# EAGLE board Noduino-Quantum-v1.0-produce (EAGLE 6.6.0), part 1 of 4
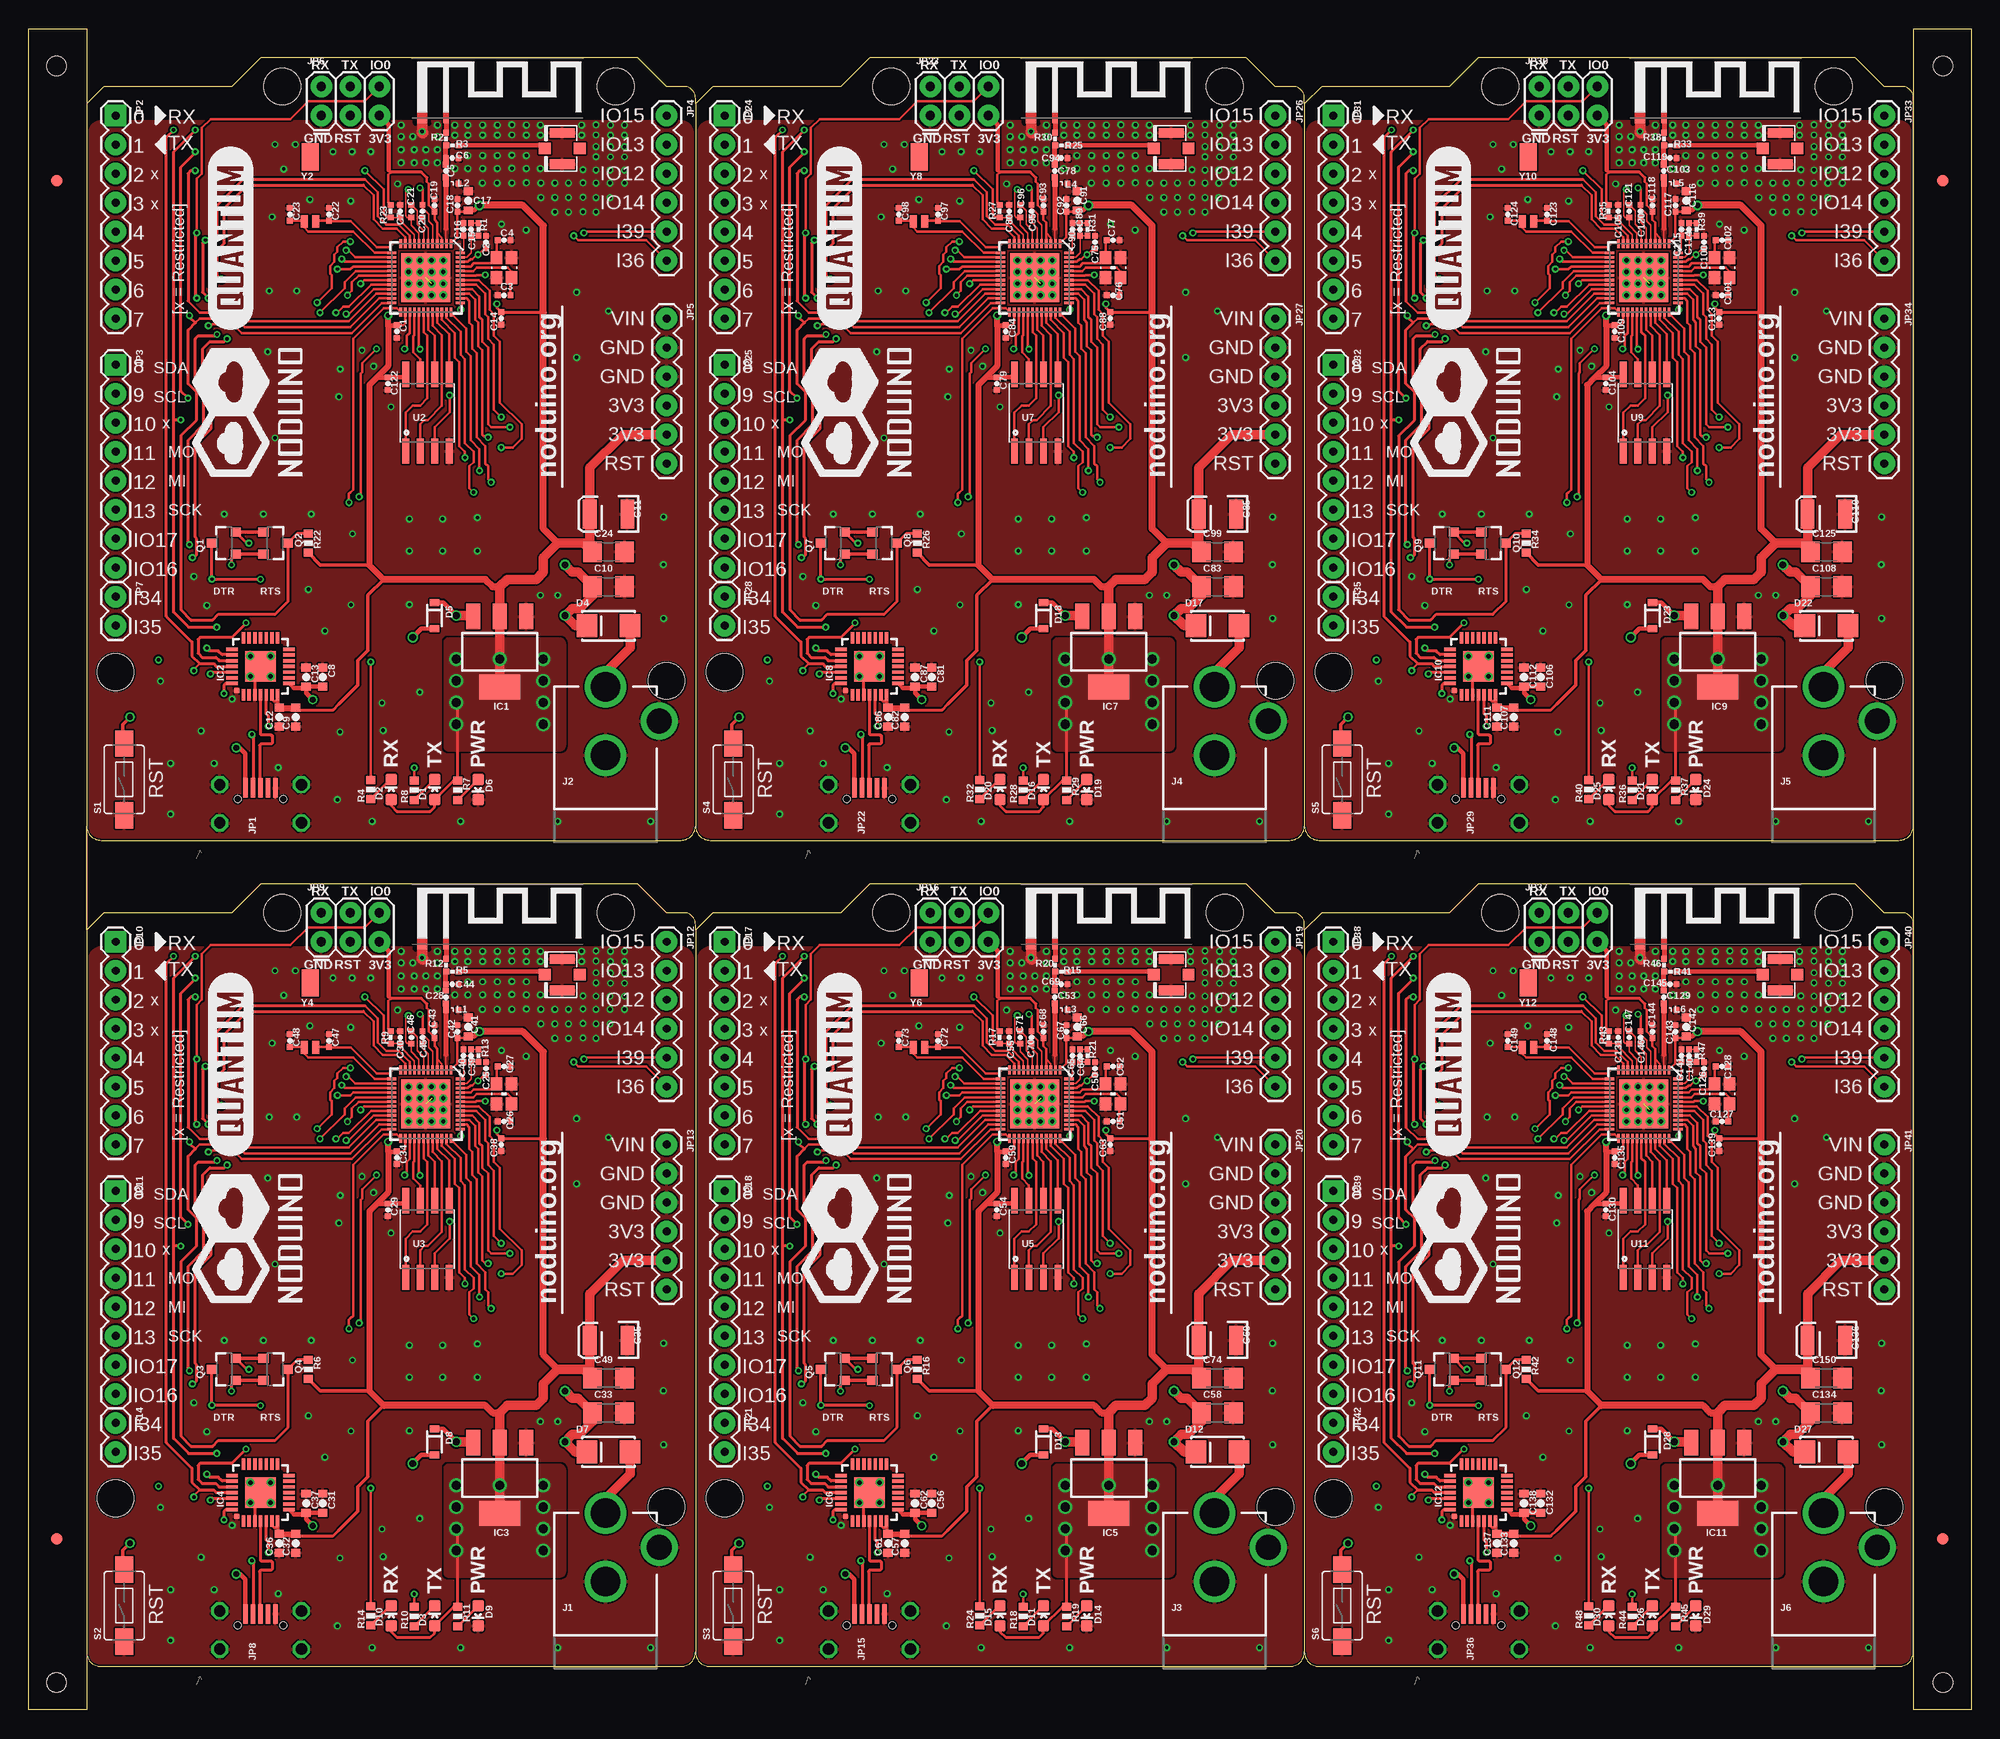
[diagram p0: board, top side]
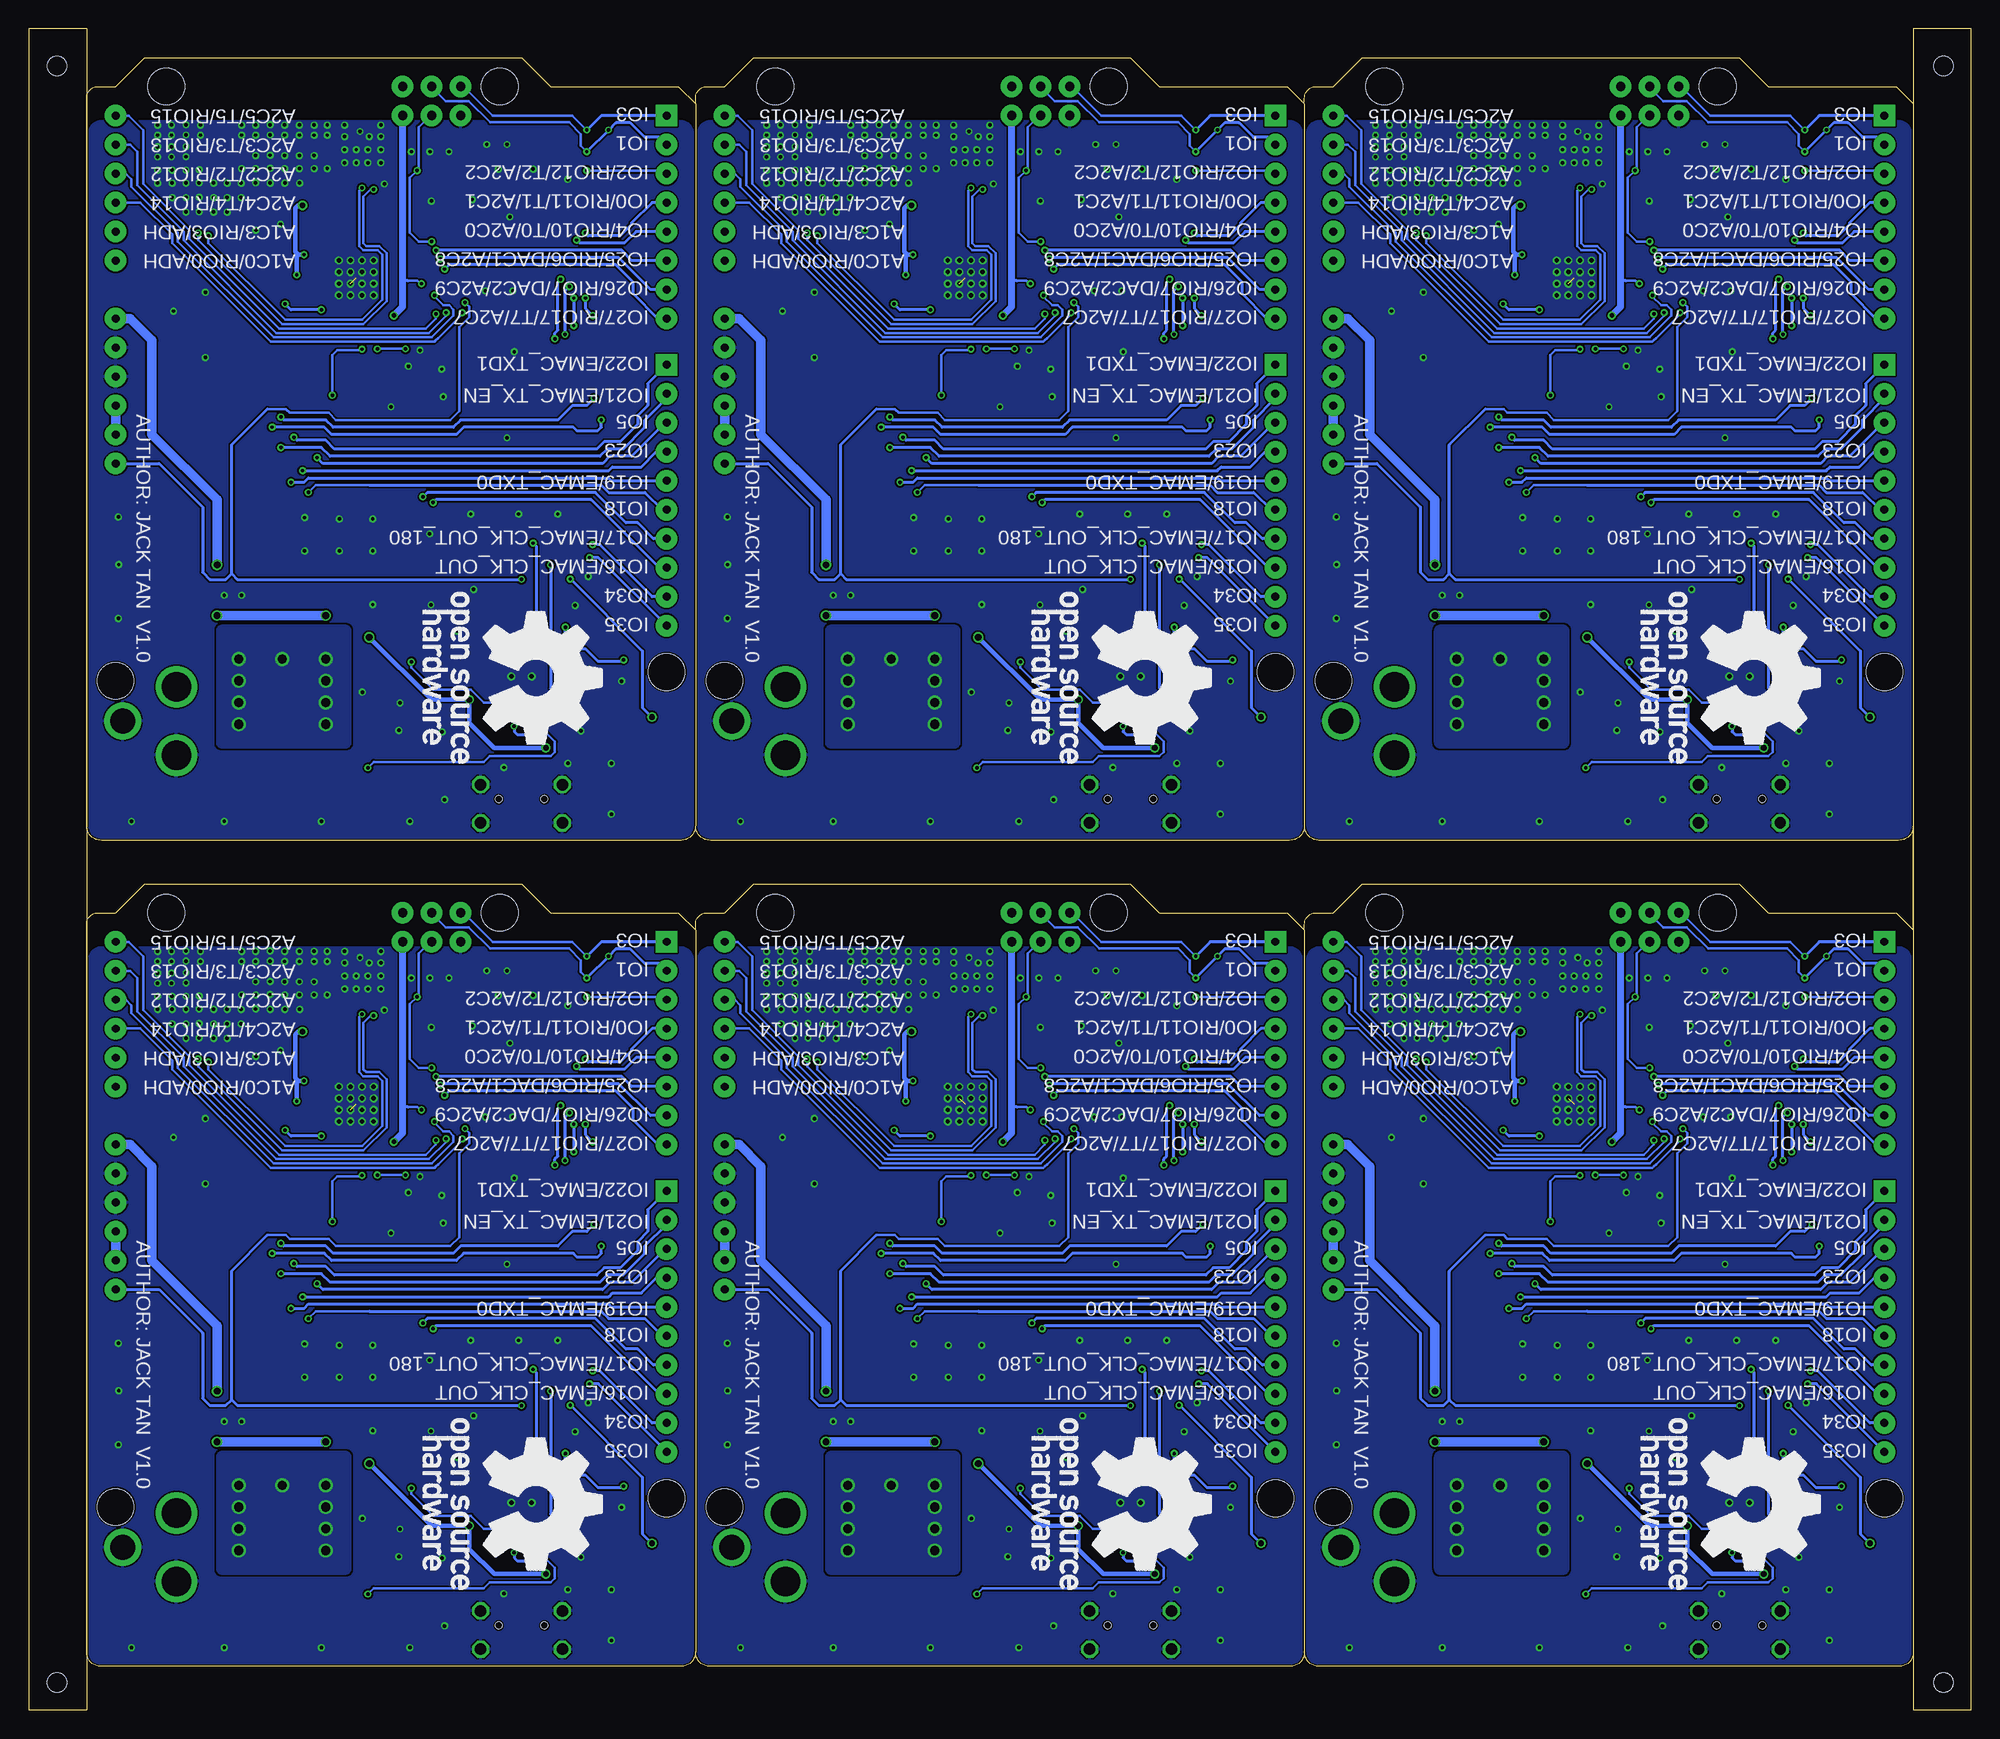
[diagram p1: board, bottom side, seen from below]

Size 170.18 x 147.32 mm. Coordinates in mm from the lower left corner, seen from the top.
Outline: 58.42,140.72 58.42,141.22 arc90 57.4,142.24 55.88,142.24 53.34,144.78 20.32,144.78 17.78,142.24 6.6,142.24 5.08,140.72 5.08,77.47 arc90 6.35,76.2 57.15,76.2 arc90 58.42,77.47
Outline: 58.42,68.33 58.42,68.83 arc90 57.4,69.85 55.88,69.85 53.34,72.39 20.32,72.39 17.78,69.85 6.6,69.85 5.08,68.33 5.08,5.08 arc90 6.35,3.81 57.15,3.81 arc90 58.42,5.08
Outline: 111.76,68.33 111.76,68.83 arc90 110.74,69.85 109.22,69.85 106.68,72.39 73.66,72.39 71.12,69.85 59.94,69.85 58.42,68.33
Outline: 58.42,68.33 58.42,5.08
Outline: 58.42,5.08 arc90 59.69,3.81 110.49,3.81 arc90 111.76,5.08
Outline: 111.76,140.72 111.76,141.22 arc90 110.74,142.24 109.22,142.24 106.68,144.78 73.66,144.78 71.12,142.24 59.94,142.24 58.42,140.72
Outline: 58.42,140.72 58.42,77.47
Outline: 58.42,77.47 arc90 59.69,76.2 110.49,76.2 arc90 111.76,77.47
Outline: 111.76,140.72 113.28,142.24 124.46,142.24 127,144.78 160.02,144.78 162.56,142.24 164.08,142.24 arc-90 165.1,141.22 165.1,77.47 arc-90 163.83,76.2 113.03,76.2 arc-90 111.76,77.47
Outline: 111.76,140.72 111.76,77.47
Outline: 111.76,68.33 113.28,69.85 124.46,69.85 127,72.39 160.02,72.39 162.56,69.85 164.08,69.85 arc-90 165.1,68.83 165.1,5.08 arc-90 163.83,3.81 113.03,3.81 arc-90 111.76,5.08
Outline: 111.76,68.33 111.76,5.08
Outline: 0,147.32 5.08,147.32 5.08,0 0,0 0,147.32
Outline: 170.18,0 165.1,0 165.1,147.32 170.18,147.32 170.18,0
Copper layers (1*16): Top 0.035mm / dielectric 1.5mm / Bottom 0.035mm
Design rules "jackslab-micromod": minimum track width 6mil, minimum drill 0.3mm, track to track 6mil, track to pad 6mil, pad to pad 6mil, via to via 6mil, smd to smd 6mil, copper to edge 6mil, drill to drill 6mil, minimum pad ring 6mil, minimum via ring 6mil, stop-mask expansion 4mil, vias tented up to drill 20mil, thermal gap 6mil
Holes 1.7 mm at 2.46,144.04 2.46,2.42 167.68,144.04 167.68,2.42
Holes 3.2 mm at 51.44,142.24 22.23,142.24 7.62,90.93 55.88,90.17 51.44,69.85 22.23,69.85 7.62,18.54 55.88,17.78 104.78,69.85 75.56,69.85 60.96,18.54 109.22,17.78 104.78,142.24 75.56,142.24 60.96,90.93 109.22,90.17 158.12,142.24 128.91,142.24 114.3,90.93 162.56,90.17 158.12,69.85 128.91,69.85 114.3,18.54 162.56,17.78
Milling: 35 lines

## Footprints (pad centres in the part's own frame; a part is rotated, then mirrored left to right if it is on the bottom)
TRACE_ANTENNA_2.4GHZ_15.2MM_TPLACE = smd 0.5 x 0.5: ANT 0,-0.25 | smd 0.9 x 0.5: GND -2.1,-0.25
U.FL = smd 2.2 x 0.85: P$1 0,1.375; P$2 0,-1.375 | smd 1.05 x 1: P$3 1.525,0; P$4 -1.525,0
0402-CAP = smd 0.5 x 0.5: 1 -0.55,0; 2 0.55,0
0603-CAP = smd 0.7 x 0.8: 1 -0.85,0; 2 0.85,0
C1206 = smd 1.6 x 1.8: 1 -1.4,0; 2 1.4,0
EIA3528 = smd 1.2 x 2.5: A 1.65,0; C -1.65,0
LED-0603 = smd 1 x 1: A 0,-0.877; C 0,0.877
DO214 = smd 1.8 x 2: A 1.9,0; C -1.9,0
SOD-323 = smd 0.63 x 0.83: 1 -1.15,0; 2 1.15,0
MARK-1MM = smd 1 x 1: P$1 0,0
SOT223 = smd 1.219 x 2.235: 1 -2.311,-3.099; 2 0,-3.099; 3 2.311,-3.099 | smd 3.6 x 2.2: 4 0,3.099
MLP28 = smd 1 x 0.3: 1 -2.5,1.5; 2 -2.5,1; 3 -2.5,0.5; 4 -2.5,0; 5 -2.5,-0.5; 6 -2.5,-1; 7 -2.5,-1.5; 15 2.5,-1.5; 16 2.5,-1; 17 2.5,-0.5; 18 2.5,0; 19 2.5,0.5; 20 2.5,1; 21 2.5,1.5 | smd 0.3 x 1: 8 -1.5,-2.5; 9 -1,-2.5; 10 -0.5,-2.5; 11 0,-2.5; 12 0.5,-2.5; 13 1,-2.5; 14 1.5,-2.5; 22 1.5,2.5; 23 1,2.5; 24 0.5,2.5; 25 0,2.5; 26 -0.5,2.5; 27 -1,2.5; 28 -1.5,2.5 | smd 2.7 x 2.7: EXP 0,0 | smd 0.435 x 0.435: M -2.103,2.103
POWER_JACK_PTH = drill 2.6: GND 0,7.7; PWR 0,13.7 | drill 2.2: GNDBREAK 4.7,10.7
MICROUSB-SMD-DIP = smd 1.7 x 0.4: D+1 3.2,0; D-1 3.2,0.65; GND1 3.2,-1.3; ID1 3.2,-0.65; VBUS1 3.2,1.3 | drill 1 octagon: P$1 0.125,-3.575; P$2 0.125,3.575; P$3 3.475,-3.575; P$4 3.475,3.575 | hole 0.6: 2.2,2; 2.2,-2
1X08 = drill 0.7 pad 1.88 square: 1 0,0 | drill 0.7 pad 1.88: 2 2.54,0; 3 5.08,0; 4 7.62,0; 5 10.16,0; 6 12.7,0; 7 15.24,0; 8 17.78,0
1X06 = drill 0.7 pad 1.88: 1 0,0; 2 2.54,0; 3 5.08,0; 4 7.62,0; 5 10.16,0; 6 12.7,0
2X3 = drill 0.8 pad 1.88: 1 0,0; 2 0,2.54; 3 2.54,0; 4 2.54,2.54; 5 5.08,0; 6 5.08,2.54
1X02 = drill 0.7 pad 1.88: 1 0,0; 2 2.54,0
0402-IND = smd 0.5 x 0.5: 1 -0.55,0; 2 0.55,0
SOT23-3 = smd 0.8 x 0.9: 1 -0.95,-1; 2 0.95,-1; 3 0,1.1
0402-RES = smd 0.5 x 0.5: 1 -0.55,0; 2 0.55,0
0603-RES = smd 0.7 x 0.8: 1 -0.85,0; 2 0.85,0
TACTILE-SWITCH-1101NE = smd 2.3 x 1.6: P$1 -3.15,0; P$2 3.15,0
QFN48-0.4MM = smd 0.8 x 0.23: 1 -3,2.2; 2 -3,1.8; 3 -3,1.4; 4 -3,1; 5 -3,0.6; 6 -3,0.2; 7 -3,-0.2; 8 -3,-0.6; 9 -3,-1; 10 -3,-1.4; 11 -3,-1.8; 12 -3,-2.2; 25 3,-2.2; 26 3,-1.8; 27 3,-1.4; 28 3,-1; 29 3,-0.6; 30 3,-0.2; 31 3,0.2; 32 3,0.6; 33 3,1; 34 3,1.4; 35 3,1.8; 36 3,2.2 | smd 0.23 x 0.8: 13 -2.2,-3; 14 -1.8,-3; 15 -1.4,-3; 16 -1,-3; 17 -0.6,-3; 18 -0.2,-3; 19 0.2,-3; 20 0.6,-3; 21 1,-3; 22 1.4,-3; 23 1.8,-3; 24 2.2,-3; 37 2.2,3; 38 1.8,3; 39 1.4,3; 40 1,3; 41 0.6,3; 42 0.2,3; 43 -0.2,3; 44 -0.6,3; 45 -1,3; 46 -1.4,3; 47 -1.8,3; 48 -2.2,3 | smd 4.3 x 4.3: EP 0,0
SO08-EIAJ = smd 0.61 x 2.21: 1 -1.905,-3.378; 2 -0.635,-3.378; 3 0.635,-3.378; 4 1.905,-3.378; 5 1.905,3.353; 6 0.635,3.353; 7 -0.635,3.353; 8 -1.905,3.353
2520-CRY = smd 1.15 x 1: 1 -0.875,-0.65; 2 0.875,-0.65; 3 0.875,0.65; 4 -0.875,0.65
CRYSTAL-32KHZ-MS3V = smd 0.6 x 1.1: P$1 -0.5,-2; P$2 0.5,-2 | smd 1.5 x 2.4: P$3 0,3.65

## Placement (x,y rotation side)
A1  [TRACE_ANTENNA_2.4GHZ_15.2MM_TPLACE]  36.58,139.52 0 top
A2  U.FL  [U.FL]  46.74,136.8 180 top
A3  U.FL  [U.FL]  46.74,64.41 180 top
A4  [TRACE_ANTENNA_2.4GHZ_15.2MM_TPLACE]  36.58,67.13 0 top
A5  U.FL  [U.FL]  100.08,64.41 180 top
A6  [TRACE_ANTENNA_2.4GHZ_15.2MM_TPLACE]  89.92,67.13 0 top
A7  U.FL  [U.FL]  100.08,136.8 180 top
A8  [TRACE_ANTENNA_2.4GHZ_15.2MM_TPLACE]  89.92,139.52 0 top
A9  U.FL  [U.FL]  153.42,136.8 180 top
A10  [TRACE_ANTENNA_2.4GHZ_15.2MM_TPLACE]  143.26,139.52 0 top
A11  U.FL  [U.FL]  153.42,64.41 180 top
A12  [TRACE_ANTENNA_2.4GHZ_15.2MM_TPLACE]  143.26,67.13 0 top
C1  100nF  [0402-CAP]  32.26,120.78 270 top
C2  100pF  [0402-CAP]  40.08,128.6 90 top
C3  15pF  [0402-CAP]  41.66,123.95 0 top
C4  15pF  [0402-CAP]  41.66,128.78 0 top
C5  6.8pF  [0402-CAP]  36.55,134.85 270 top
C6  2.4pF  [0402-CAP]  37.11,135.97 0 top
C7  100nF  [0402-CAP]  32.56,131.32 90 top
C8  100nF  [0603-CAP]  25.78,90.5 270 top
C9  100nF  [0603-CAP]  23.42,87 90 top
C10  22uF  [C1206]  50.8,98.43 0 top
C11  100uF  [EIA3528]  50.8,104.78 180 top
C12  4.7uF  [0603-CAP]  21.95,87 90 top
C13  1uF  [0603-CAP]  24.31,90.5 270 top
C14  100nF  [0402-CAP]  41.4,121.92 90 top
C15  3nF  [0402-CAP]  38.76,129.72 270 top
C16  10nF  [0402-CAP]  38.1,129.72 90 top
C17  10uF  [0603-CAP]  38.51,132.23 90 top
C18  100nF  [0402-CAP]  37.57,131.83 90 top
C19  100nF  [0402-CAP]  35.56,131.83 270 top
C20  270pF  [0402-CAP]  34.52,131.32 270 top
C21  270pF  [0402-CAP]  33.53,131.32 270 top
C22  12pF  [0402-CAP]  26.31,131.04 270 top
C23  12pF  [0402-CAP]  22.89,131.04 270 top
C24  10uF  [C1206]  50.8,101.47 0 top
C25  100pF  [0402-CAP]  40.08,56.21 90 top
C26  15pF  [0402-CAP]  41.66,51.56 0 top
C27  15pF  [0402-CAP]  41.66,56.39 0 top
C28  6.8pF  [0402-CAP]  36.55,62.46 270 top
C29  100nF  [0402-CAP]  31.47,43.82 270 top
C30  100nF  [0402-CAP]  32.56,58.93 90 top
C31  100nF  [0603-CAP]  25.78,18.11 270 top
C32  100nF  [0603-CAP]  23.42,14.61 90 top
C33  22uF  [C1206]  50.8,26.04 0 top
C34  100nF  [0402-CAP]  32.26,48.39 270 top
C35  100uF  [EIA3528]  50.8,32.39 180 top
C36  4.7uF  [0603-CAP]  21.95,14.61 90 top
C37  1uF  [0603-CAP]  24.31,18.11 270 top
C38  100nF  [0402-CAP]  41.4,49.53 90 top
C39  3nF  [0402-CAP]  38.76,57.33 270 top
C40  10nF  [0402-CAP]  38.1,57.33 90 top
C41  10uF  [0603-CAP]  38.51,59.84 90 top
C42  100nF  [0402-CAP]  37.57,59.44 90 top
C43  100nF  [0402-CAP]  35.56,59.44 270 top
C44  2.4pF  [0402-CAP]  37.11,63.58 0 top
C45  270pF  [0402-CAP]  34.52,58.93 270 top
C46  270pF  [0402-CAP]  33.53,58.93 270 top
C47  12pF  [0402-CAP]  26.31,58.65 270 top
C48  12pF  [0402-CAP]  22.89,58.65 270 top
C49  10uF  [C1206]  50.8,29.08 0 top
C50  100pF  [0402-CAP]  93.42,56.21 90 top
C51  15pF  [0402-CAP]  95,51.56 0 top
C52  15pF  [0402-CAP]  95,56.39 0 top
C53  6.8pF  [0402-CAP]  89.89,62.46 270 top
C54  100nF  [0402-CAP]  84.81,43.82 270 top
C55  100nF  [0402-CAP]  85.9,58.93 90 top
C56  100nF  [0603-CAP]  79.12,18.11 270 top
C57  100nF  [0603-CAP]  76.76,14.61 90 top
C58  22uF  [C1206]  104.14,26.04 0 top
C59  100nF  [0402-CAP]  85.6,48.39 270 top
C60  100uF  [EIA3528]  104.14,32.39 180 top
C61  4.7uF  [0603-CAP]  75.29,14.61 90 top
C62  1uF  [0603-CAP]  77.65,18.11 270 top
C63  100nF  [0402-CAP]  94.74,49.53 90 top
C64  3nF  [0402-CAP]  92.1,57.33 270 top
C65  10nF  [0402-CAP]  91.44,57.33 90 top
C66  10uF  [0603-CAP]  91.85,59.84 90 top
C67  100nF  [0402-CAP]  90.91,59.44 90 top
C68  100nF  [0402-CAP]  88.9,59.44 270 top
C69  2.4pF  [0402-CAP]  90.45,63.58 0 top
C70  270pF  [0402-CAP]  87.86,58.93 270 top
C71  270pF  [0402-CAP]  86.87,58.93 270 top
C72  12pF  [0402-CAP]  79.65,58.65 270 top
C73  12pF  [0402-CAP]  76.23,58.65 270 top
C74  10uF  [C1206]  104.14,29.08 0 top
C75  100pF  [0402-CAP]  93.42,128.6 90 top
C76  15pF  [0402-CAP]  95,123.95 0 top
C77  15pF  [0402-CAP]  95,128.78 0 top
C78  6.8pF  [0402-CAP]  89.89,134.85 270 top
C79  100nF  [0402-CAP]  84.81,116.21 270 top
C80  100nF  [0402-CAP]  85.9,131.32 90 top
C81  100nF  [0603-CAP]  79.12,90.5 270 top
C82  100nF  [0603-CAP]  76.76,87 90 top
C83  22uF  [C1206]  104.14,98.43 0 top
C84  100nF  [0402-CAP]  85.6,120.78 270 top
C85  100uF  [EIA3528]  104.14,104.78 180 top
C86  4.7uF  [0603-CAP]  75.29,87 90 top
C87  1uF  [0603-CAP]  77.65,90.5 270 top
C88  100nF  [0402-CAP]  94.74,121.92 90 top
C89  3nF  [0402-CAP]  92.1,129.72 270 top
C90  10nF  [0402-CAP]  91.44,129.72 90 top
C91  10uF  [0603-CAP]  91.85,132.23 90 top
C92  100nF  [0402-CAP]  90.91,131.83 90 top
C93  100nF  [0402-CAP]  88.9,131.83 270 top
C94  2.4pF  [0402-CAP]  90.45,135.97 0 top
C95  270pF  [0402-CAP]  87.86,131.32 270 top
C96  270pF  [0402-CAP]  86.87,131.32 270 top
C97  12pF  [0402-CAP]  79.65,131.04 270 top
C98  12pF  [0402-CAP]  76.23,131.04 270 top
C99  10uF  [C1206]  104.14,101.47 0 top
C100  100pF  [0402-CAP]  146.76,128.6 90 top
C101  15pF  [0402-CAP]  148.34,123.95 0 top
C102  15pF  [0402-CAP]  148.34,128.78 0 top
C103  6.8pF  [0402-CAP]  143.23,134.85 270 top
C104  100nF  [0402-CAP]  138.15,116.21 270 top
C105  100nF  [0402-CAP]  139.24,131.32 90 top
C106  100nF  [0603-CAP]  132.46,90.5 270 top
C107  100nF  [0603-CAP]  130.1,87 90 top
C108  22uF  [C1206]  157.48,98.43 0 top
C109  100nF  [0402-CAP]  138.94,120.78 270 top
C110  100uF  [EIA3528]  157.48,104.78 180 top
C111  4.7uF  [0603-CAP]  128.63,87 90 top
C112  1uF  [0603-CAP]  130.99,90.5 270 top
C113  100nF  [0402-CAP]  148.08,121.92 90 top
C114  3nF  [0402-CAP]  145.44,129.72 270 top
C115  10nF  [0402-CAP]  144.78,129.72 90 top
C116  10uF  [0603-CAP]  145.19,132.23 90 top
C117  100nF  [0402-CAP]  144.25,131.83 90 top
C118  100nF  [0402-CAP]  142.24,131.83 270 top
C119  2.4pF  [0402-CAP]  143.79,135.97 0 top
C120  270pF  [0402-CAP]  141.2,131.32 270 top
C121  270pF  [0402-CAP]  140.21,131.32 270 top
C122  100nF  [0402-CAP]  31.47,116.21 270 top
C123  12pF  [0402-CAP]  132.99,131.04 270 top
C124  12pF  [0402-CAP]  129.57,131.04 270 top
C125  10uF  [C1206]  157.48,101.47 0 top
C126  100pF  [0402-CAP]  146.76,56.21 90 top
C127  15pF  [0402-CAP]  148.34,51.56 0 top
C128  15pF  [0402-CAP]  148.34,56.39 0 top
C129  6.8pF  [0402-CAP]  143.23,62.46 270 top
C130  100nF  [0402-CAP]  138.15,43.82 270 top
C131  100nF  [0402-CAP]  139.24,58.93 90 top
C132  100nF  [0603-CAP]  132.46,18.11 270 top
C133  100nF  [0603-CAP]  130.1,14.61 90 top
C134  22uF  [C1206]  157.48,26.04 0 top
C135  100nF  [0402-CAP]  138.94,48.39 270 top
C136  100uF  [EIA3528]  157.48,32.39 180 top
C137  4.7uF  [0603-CAP]  128.63,14.61 90 top
C138  1uF  [0603-CAP]  130.99,18.11 270 top
C139  100nF  [0402-CAP]  148.08,49.53 90 top
C140  3nF  [0402-CAP]  145.44,57.33 270 top
C141  10nF  [0402-CAP]  144.78,57.33 90 top
C142  10uF  [0603-CAP]  145.19,59.84 90 top
C143  100nF  [0402-CAP]  144.25,59.44 90 top
C144  100nF  [0402-CAP]  142.24,59.44 270 top
C145  2.4pF  [0402-CAP]  143.79,63.58 0 top
C146  270pF  [0402-CAP]  141.2,58.93 270 top
C147  270pF  [0402-CAP]  140.21,58.93 270 top
C148  12pF  [0402-CAP]  132.99,58.65 270 top
C149  12pF  [0402-CAP]  129.57,58.65 270 top
C150  10uF  [C1206]  157.48,29.08 0 top
D1  BLUE  [LED-0603]  35.56,80.65 0 top
D2  BLUE  [LED-0603]  31.75,80.65 0 top
D3  BLUE  [LED-0603]  35.56,8.26 0 top
D4  SS4  [DO214]  50.8,95 0 top
D5  S4  [SOD-323]  35.56,95.89 270 top
D6  GREEN  [LED-0603]  39.37,80.65 180 top
D7  SS4  [DO214]  50.8,22.61 0 top
D8  S4  [SOD-323]  35.56,23.5 270 top
D9  GREEN  [LED-0603]  39.37,8.26 180 top
D10  BLUE  [LED-0603]  31.75,8.26 0 top
D11  BLUE  [LED-0603]  88.9,8.26 0 top
D12  SS4  [DO214]  104.14,22.61 0 top
D13  S4  [SOD-323]  88.9,23.5 270 top
D14  GREEN  [LED-0603]  92.71,8.26 180 top
D15  BLUE  [LED-0603]  85.09,8.26 0 top
D16  BLUE  [LED-0603]  88.9,80.65 0 top
D17  SS4  [DO214]  104.14,95 0 top
D18  S4  [SOD-323]  88.9,95.89 270 top
D19  GREEN  [LED-0603]  92.71,80.65 180 top
D20  BLUE  [LED-0603]  85.09,80.65 0 top
D21  BLUE  [LED-0603]  142.24,80.65 0 top
D22  SS4  [DO214]  157.48,95 0 top
D23  S4  [SOD-323]  142.24,95.89 270 top
D24  GREEN  [LED-0603]  146.05,80.65 180 top
D25  BLUE  [LED-0603]  138.43,80.65 0 top
D26  BLUE  [LED-0603]  142.24,8.26 0 top
D27  SS4  [DO214]  157.48,22.61 0 top
D28  S4  [SOD-323]  142.24,23.5 270 top
D29  GREEN  [LED-0603]  146.05,8.26 180 top
D30  BLUE  [LED-0603]  138.43,8.26 0 top
E$1  [MARK-1MM]  2.46,134 0 top
E$2  [MARK-1MM]  2.46,15 0 top
E$3  [MARK-1MM]  167.68,134 0 top
E$4  [MARK-1MM]  167.68,15 0 top
IC1  1117-3.3  [SOT223]  41.28,92.71 180 top
IC2  CP210X_USB_UART  [MLP28]  20.32,91.44 90 top
IC3  1117-3.3  [SOT223]  41.28,20.32 180 top
IC4  CP210X_USB_UART  [MLP28]  20.32,19.05 90 top
IC5  1117-3.3  [SOT223]  94.62,20.32 180 top
IC6  CP210X_USB_UART  [MLP28]  73.66,19.05 90 top
IC7  1117-3.3  [SOT223]  94.62,92.71 180 top
IC8  CP210X_USB_UART  [MLP28]  73.66,91.44 90 top
IC9  1117-3.3  [SOT223]  147.96,92.71 180 top
IC10  CP210X_USB_UART  [MLP28]  127,91.44 90 top
IC11  1117-3.3  [SOT223]  147.96,20.32 180 top
IC12  CP210X_USB_UART  [MLP28]  127,19.05 90 top
J1  POWER_JACKPTH  [POWER_JACK_PTH]  50.55,3.56 0 top
J2  POWER_JACKPTH  [POWER_JACK_PTH]  50.55,75.95 0 top
J3  POWER_JACKPTH  [POWER_JACK_PTH]  103.89,3.56 0 top
J4  POWER_JACKPTH  [POWER_JACK_PTH]  103.89,75.95 0 top
J5  POWER_JACKPTH  [POWER_JACK_PTH]  157.23,75.95 0 top
J6  POWER_JACKPTH  [POWER_JACK_PTH]  157.23,3.56 0 top
JP1  [MICROUSB-SMD-DIP]  20.32,77.6 90 top
JP2  M081X08  [1X08]  7.62,139.7 270 top
JP3  M081X08  [1X08]  7.62,117.86 270 top
JP4  M06SIP  [1X06]  55.88,139.7 270 top
JP5  M06SIP  [1X06]  55.88,121.92 270 top
JP6  M02X3  [2X3]  25.65,139.7 0 top
JP7  [1X02]  7.62,97.54 270 top
JP8  [MICROUSB-SMD-DIP]  20.32,5.21 90 top
JP9  M02X3  [2X3]  25.65,67.31 0 top
JP10  M081X08  [1X08]  7.62,67.31 270 top
JP11  M081X08  [1X08]  7.62,45.47 270 top
JP12  M06SIP  [1X06]  55.88,67.31 270 top
JP13  M06SIP  [1X06]  55.88,49.53 270 top
JP14  [1X02]  7.62,25.15 270 top
JP15  [MICROUSB-SMD-DIP]  73.66,5.21 90 top
JP16  M02X3  [2X3]  78.99,67.31 0 top
JP17  M081X08  [1X08]  60.96,67.31 270 top
JP18  M081X08  [1X08]  60.96,45.47 270 top
JP19  M06SIP  [1X06]  109.22,67.31 270 top
JP20  M06SIP  [1X06]  109.22,49.53 270 top
JP21  [1X02]  60.96,25.15 270 top
JP22  [MICROUSB-SMD-DIP]  73.66,77.6 90 top
JP23  M02X3  [2X3]  78.99,139.7 0 top
JP24  M081X08  [1X08]  60.96,139.7 270 top
JP25  M081X08  [1X08]  60.96,117.86 270 top
JP26  M06SIP  [1X06]  109.22,139.7 270 top
JP27  M06SIP  [1X06]  109.22,121.92 270 top
JP28  [1X02]  60.96,97.54 270 top
JP29  [MICROUSB-SMD-DIP]  127,77.6 90 top
JP30  M02X3  [2X3]  132.33,139.7 0 top
JP31  M081X08  [1X08]  114.3,139.7 270 top
JP32  M081X08  [1X08]  114.3,117.86 270 top
JP33  M06SIP  [1X06]  162.56,139.7 270 top
JP34  M06SIP  [1X06]  162.56,121.92 270 top
JP35  [1X02]  114.3,97.54 270 top
JP36  [MICROUSB-SMD-DIP]  127,5.21 90 top
JP37  M02X3  [2X3]  132.33,67.31 0 top
JP38  M081X08  [1X08]  114.3,67.31 270 top
JP39  M081X08  [1X08]  114.3,45.47 270 top
JP40  M06SIP  [1X06]  162.56,67.31 270 top
JP41  M06SIP  [1X06]  162.56,49.53 270 top
JP42  [1X02]  114.3,25.15 270 top
L1  1.6nH  [0402-IND]  37.11,61.34 180 top
L2  1.6nH  [0402-IND]  37.11,133.73 180 top
L3  1.6nH  [0402-IND]  90.45,61.34 180 top
L4  1.6nH  [0402-IND]  90.45,133.73 180 top
L5  1.6nH  [0402-IND]  143.79,133.73 180 top
L6  1.6nH  [0402-IND]  143.79,61.34 180 top
Q1  SI2302  [SOT23-3]  17.15,102.23 90 top
Q2  SI2302  [SOT23-3]  21.59,102.23 270 top
Q3  SI2302  [SOT23-3]  17.15,29.85 90 top
Q4  SI2302  [SOT23-3]  21.59,29.85 270 top
Q5  SI2302  [SOT23-3]  70.49,29.85 90 top
Q6  SI2302  [SOT23-3]  74.93,29.85 270 top
Q7  SI2302  [SOT23-3]  70.49,102.23 90 top
Q8  SI2302  [SOT23-3]  74.93,102.23 270 top
Q9  SI2302  [SOT23-3]  123.83,102.23 90 top
Q10  SI2302  [SOT23-3]  128.27,102.23 270 top
Q11  SI2302  [SOT23-3]  123.83,29.85 90 top
Q12  SI2302  [SOT23-3]  128.27,29.85 270 top
R1  20K  [0402-RES]  39.42,129.72 270 top
R2  0R  [0402-RES]  36.58,137.64 270 top
R3  DNP  [0402-RES]  37.13,137.08 0 top
R4  1K  [0603-RES]  29.97,80.65 90 top
R5  DNP  [0402-RES]  37.13,64.69 0 top
R6  10K  [0603-RES]  24.51,29.85 270 top
R7  1K  [0603-RES]  37.59,80.59 270 top
R8  1K  [0603-RES]  33.78,80.59 90 top
R9  10K  [0402-RES]  31.72,58.93 90 top
R10  1K  [0603-RES]  33.78,8.2 90 top
R11  1K  [0603-RES]  37.59,8.2 270 top
R12  0R  [0402-RES]  36.58,65.25 270 top
R13  20K  [0402-RES]  39.42,57.33 270 top
R14  1K  [0603-RES]  29.97,8.26 90 top
R15  DNP  [0402-RES]  90.47,64.69 0 top
R16  10K  [0603-RES]  77.85,29.85 270 top
R17  10K  [0402-RES]  85.06,58.93 90 top
R18  1K  [0603-RES]  87.12,8.2 90 top
R19  1K  [0603-RES]  90.93,8.2 270 top
R20  0R  [0402-RES]  89.92,65.25 270 top
R21  20K  [0402-RES]  92.76,57.33 270 top
R22  10K  [0603-RES]  24.51,102.23 270 top
R23  10K  [0402-RES]  31.72,131.32 90 top
R24  1K  [0603-RES]  83.31,8.26 90 top
R25  DNP  [0402-RES]  90.47,137.08 0 top
R26  10K  [0603-RES]  77.85,102.23 270 top
R27  10K  [0402-RES]  85.06,131.32 90 top
R28  1K  [0603-RES]  87.12,80.59 90 top
R29  1K  [0603-RES]  90.93,80.59 270 top
R30  0R  [0402-RES]  89.92,137.64 270 top
R31  20K  [0402-RES]  92.76,129.72 270 top
R32  1K  [0603-RES]  83.31,80.65 90 top
R33  DNP  [0402-RES]  143.81,137.08 0 top
R34  10K  [0603-RES]  131.19,102.23 270 top
R35  10K  [0402-RES]  138.4,131.32 90 top
R36  1K  [0603-RES]  140.46,80.59 90 top
R37  1K  [0603-RES]  144.27,80.59 270 top
R38  0R  [0402-RES]  143.26,137.64 270 top
R39  20K  [0402-RES]  146.1,129.72 270 top
R40  1K  [0603-RES]  136.65,80.65 90 top
R41  DNP  [0402-RES]  143.81,64.69 0 top
R42  10K  [0603-RES]  131.19,29.85 270 top
R43  10K  [0402-RES]  138.4,58.93 90 top
R44  1K  [0603-RES]  140.46,8.2 90 top
R45  1K  [0603-RES]  144.27,8.2 270 top
R46  0R  [0402-RES]  143.26,65.25 270 top
R47  20K  [0402-RES]  146.1,57.33 270 top
R48  1K  [0603-RES]  136.65,8.26 90 top
S1  SWITCH-SMD  [TACTILE-SWITCH-1101NE]  8.38,81.53 90 top
S2  SWITCH-SMD  [TACTILE-SWITCH-1101NE]  8.38,9.14 90 top
S3  SWITCH-SMD  [TACTILE-SWITCH-1101NE]  61.72,9.14 90 top
S4  SWITCH-SMD  [TACTILE-SWITCH-1101NE]  61.72,81.53 90 top
S5  SWITCH-SMD  [TACTILE-SWITCH-1101NE]  115.06,81.53 90 top
S6  SWITCH-SMD  [TACTILE-SWITCH-1101NE]  115.06,9.14 90 top
U1  ESP32  [QFN48-0.4MM]  34.8,125.48 270 top
U2  SPI_FLASH-X25XXSMD1  [SO08-EIAJ]  34.93,113.67 0 top
U3  SPI_FLASH-X25XXSMD1  [SO08-EIAJ]  34.93,41.28 0 top
U4  ESP32  [QFN48-0.4MM]  34.8,53.09 270 top
U5  SPI_FLASH-X25XXSMD1  [SO08-EIAJ]  88.27,41.28 0 top
U6  ESP32  [QFN48-0.4MM]  88.14,53.09 270 top
U7  SPI_FLASH-X25XXSMD1  [SO08-EIAJ]  88.27,113.67 0 top
U8  ESP32  [QFN48-0.4MM]  88.14,125.48 270 top
U9  SPI_FLASH-X25XXSMD1  [SO08-EIAJ]  141.61,113.67 0 top
U10  ESP32  [QFN48-0.4MM]  141.48,125.48 270 top
U11  SPI_FLASH-X25XXSMD1  [SO08-EIAJ]  141.61,41.28 0 top
U12  ESP32  [QFN48-0.4MM]  141.48,53.09 270 top
U$1  NODUINO-LOGO-ALL  [NODUINO-ALL-1]  24.64,107.7 90 top
U$2  NODUINO-QUANTUM-LOGO  [NODUINO-QUANTUM-LOGO]  19.65,120.96 90 top
U$3  OPEN_HARDWARE_LOGO  [OPEN_HARDWARE_LOGO]  28.98,97.91 270 bottom
U$4  NODUINO-LOGO-ALL  [NODUINO-ALL-1]  24.64,35.31 90 top
U$5  NODUINO-QUANTUM-LOGO  [NODUINO-QUANTUM-LOGO]  19.65,48.57 90 top
U$6  OPEN_HARDWARE_LOGO  [OPEN_HARDWARE_LOGO]  28.98,25.52 270 bottom
U$7  NODUINO-LOGO-ALL  [NODUINO-ALL-1]  77.98,35.31 90 top
U$8  NODUINO-QUANTUM-LOGO  [NODUINO-QUANTUM-LOGO]  72.99,48.57 90 top
U$9  OPEN_HARDWARE_LOGO  [OPEN_HARDWARE_LOGO]  82.32,25.52 270 bottom
U$10  NODUINO-LOGO-ALL  [NODUINO-ALL-1]  77.98,107.7 90 top
U$11  NODUINO-QUANTUM-LOGO  [NODUINO-QUANTUM-LOGO]  72.99,120.96 90 top
U$12  OPEN_HARDWARE_LOGO  [OPEN_HARDWARE_LOGO]  82.32,97.91 270 bottom
U$13  NODUINO-LOGO-ALL  [NODUINO-ALL-1]  131.32,107.7 90 top
U$14  NODUINO-QUANTUM-LOGO  [NODUINO-QUANTUM-LOGO]  126.33,120.96 90 top
U$15  OPEN_HARDWARE_LOGO  [OPEN_HARDWARE_LOGO]  135.66,97.91 270 bottom
U$16  NODUINO-LOGO-ALL  [NODUINO-ALL-1]  131.32,35.31 90 top
U$17  NODUINO-QUANTUM-LOGO  [NODUINO-QUANTUM-LOGO]  126.33,48.57 90 top
U$18  OPEN_HARDWARE_LOGO  [OPEN_HARDWARE_LOGO]  135.66,25.52 270 bottom
Y1  40MHz  [2520-CRY]  41.66,126.37 90 top
Y2  32KHz  [CRYSTAL-32KHZ-MS3V]  24.66,132.44 0 top
Y3  40MHz  [2520-CRY]  41.66,53.98 90 top
Y4  32KHz  [CRYSTAL-32KHZ-MS3V]  24.66,60.05 0 top
Y5  40MHz  [2520-CRY]  95,53.98 90 top
Y6  32KHz  [CRYSTAL-32KHZ-MS3V]  78,60.05 0 top
Y7  40MHz  [2520-CRY]  95,126.37 90 top
Y8  32KHz  [CRYSTAL-32KHZ-MS3V]  78,132.44 0 top
Y9  40MHz  [2520-CRY]  148.34,126.37 90 top
Y10  32KHz  [CRYSTAL-32KHZ-MS3V]  131.34,132.44 0 top
Y11  40MHz  [2520-CRY]  148.34,53.98 90 top
Y12  32KHz  [CRYSTAL-32KHZ-MS3V]  131.34,60.05 0 top

## Library data of the parts
A1 A4 A6 A8 A10 A12 C1-C9 C11-C23 C25-C32 C34-C48 C50-C57 C59-C73 C75-C82 C84-C98 C100-C107 C109-C124 C126-C133 C135-C149 D4 D5 D7 D8 D12 D13 D17 D18 D22 D23 D27 D28 E$1-E$4 IC1-IC12 J1-J6 JP1-JP42 L1-L6 R1-R48 S1-S6 U1-U12 U$1-U$18 Y1-Y12 = ehl
A2 A3 A5 A7 A9 A11 = SparkFun_ESP8266_Thing; PROD_ID: CONN-09193
C10 C24 C33 C49 C58 C74 C83 C99 C108 C125 C134 C150 Q1-Q12 = digital-toy
D1-D3 D6 D9-D11 D14-D16 D19-D21 D24-D26 D29 D30 = SparkFun_ESP8266_Thing; PROD_ID: DIO-00821

## Nets
3V1: C25.1 C29.1 C32.2 C34.1 C35.A C36.2 C38.2 C41.1 C42.1 C43.2 C49.1 D3.A D10.A IC3.2 IC3.4 IC4.6 IC4.7 JP9.5 JP13.4 JP13.5 R6.2 R9.2 R11.1 U3.8 U4.1 U4.3 U4.4 U4.19 U4.26 U4.37 U4.43 U4.46
3V2: C50.1 C54.1 C57.2 C59.1 C60.A C61.2 C63.2 C66.1 C67.1 C68.2 C74.1 D11.A D15.A IC5.2 IC5.4 IC6.6 IC6.7 JP16.5 JP20.4 JP20.5 R16.2 R17.2 R19.1 U5.8 U6.1 U6.3 U6.4 U6.19 U6.26 U6.37 U6.43 U6.46
3V3: C1.1 C2.1 C9.2 C11.A C12.2 C14.2 C17.1 C18.1 C19.2 C24.1 C122.1 D1.A D2.A IC1.2 IC1.4 IC2.6 IC2.7 JP5.4 JP5.5 JP6.5 R7.1 R22.2 R23.2 U1.1 U1.3 U1.4 U1.19 U1.26 U1.37 U1.43 U1.46 U2.8
3V4: C75.1 C79.1 C82.2 C84.1 C85.A C86.2 C88.2 C91.1 C92.1 C93.2 C99.1 D16.A D20.A IC7.2 IC7.4 IC8.6 IC8.7 JP23.5 JP27.4 JP27.5 R26.2 R27.2 R29.1 U7.8 U8.1 U8.3 U8.4 U8.19 U8.26 U8.37 U8.43 U8.46
3V5: C100.1 C104.1 C107.2 C109.1 C110.A C111.2 C113.2 C116.1 C117.1 C118.2 C125.1 D21.A D25.A IC9.2 IC9.4 IC10.6 IC10.7 JP30.5 JP34.4 JP34.5 R34.2 R35.2 R37.1 U9.8 U10.1 U10.3 U10.4 U10.19 U10.26 U10.37 U10.43 U10.46
3V6: C126.1 C130.1 C133.2 C135.1 C136.A C137.2 C139.2 C142.1 C143.1 C144.2 C150.1 D26.A D30.A IC11.2 IC11.4 IC12.6 IC12.7 JP37.5 JP41.4 JP41.5 R42.2 R43.2 R45.1 U11.8 U12.1 U12.3 U12.4 U12.19 U12.26 U12.37 U12.43 U12.46
CTS: IC2.23
CTS1: IC4.23
CTS2: IC6.23
CTS3: IC8.23
CTS4: IC10.23
CTS5: IC12.23
DCD: IC2.1
DCD1: IC4.1
DCD2: IC6.1
DCD3: IC8.1
DCD4: IC10.1
DCD5: IC12.1
DSR: IC2.27
DSR1: IC4.27
DSR2: IC6.27
DSR3: IC8.27
DSR4: IC10.27
DSR5: IC12.27
DTR: IC2.28 Q1.1 Q2.2
DTR1: IC4.28 Q3.1 Q4.2
DTR2: IC6.28 Q5.1 Q6.2
DTR3: IC8.28 Q7.1 Q8.2
DTR4: IC10.28 Q9.1 Q10.2
DTR5: IC12.28 Q11.1 Q12.2
GND: A1.GND A2.P$1 A2.P$2 C1.2 C2.2 C3.1 C4.2 C6.2 C7.2 C8.1 C9.1 C10.2 C11.C C12.1 C13.1 C14.1 C16.2 C17.2 C18.2 C19.1 C22.1 C23.1 C24.2 C122.2 D6.C IC1.1 IC2.3 IC2.EXP IC2.M J2.GND J2.GNDBREAK JP1.GND1 JP1.P$1 JP1.P$2 JP1.P$3 JP1.P$4 JP5.2 JP5.3 JP6.1 L2.1 S1.P$1 U1.EP U2.4 Y1.2 Y1.4
GND1: A3.P$1 A3.P$2 A4.GND C25.2 C26.1 C27.2 C29.2 C30.2 C31.1 C32.1 C33.2 C34.2 C35.C C36.1 C37.1 C38.1 C40.2 C41.2 C42.2 C43.1 C44.2 C47.1 C48.1 C49.2 D9.C IC3.1 IC4.3 IC4.EXP IC4.M J1.GND J1.GNDBREAK JP8.GND1 JP8.P$1 JP8.P$2 JP8.P$3 JP8.P$4 JP9.1 JP13.2 JP13.3 L1.1 S2.P$1 U3.4 U4.EP Y3.2 Y3.4
GND2: A5.P$1 A5.P$2 A6.GND C50.2 C51.1 C52.2 C54.2 C55.2 C56.1 C57.1 C58.2 C59.2 C60.C C61.1 C62.1 C63.1 C65.2 C66.2 C67.2 C68.1 C69.2 C72.1 C73.1 C74.2 D14.C IC5.1 IC6.3 IC6.EXP IC6.M J3.GND J3.GNDBREAK JP15.GND1 JP15.P$1 JP15.P$2 JP15.P$3 JP15.P$4 JP16.1 JP20.2 JP20.3 L3.1 S3.P$1 U5.4 U6.EP Y5.2 Y5.4
GND3: A7.P$1 A7.P$2 A8.GND C75.2 C76.1 C77.2 C79.2 C80.2 C81.1 C82.1 C83.2 C84.2 C85.C C86.1 C87.1 C88.1 C90.2 C91.2 C92.2 C93.1 C94.2 C97.1 C98.1 C99.2 D19.C IC7.1 IC8.3 IC8.EXP IC8.M J4.GND J4.GNDBREAK JP22.GND1 JP22.P$1 JP22.P$2 JP22.P$3 JP22.P$4 JP23.1 JP27.2 JP27.3 L4.1 S4.P$1 U7.4 U8.EP Y7.2 Y7.4
GND4: A9.P$1 A9.P$2 A10.GND C100.2 C101.1 C102.2 C104.2 C105.2 C106.1 C107.1 C108.2 C109.2 C110.C C111.1 C112.1 C113.1 C115.2 C116.2 C117.2 C118.1 C119.2 C123.1 C124.1 C125.2 D24.C IC9.1 IC10.3 IC10.EXP IC10.M J5.GND J5.GNDBREAK JP29.GND1 JP29.P$1 JP29.P$2 JP29.P$3 JP29.P$4 JP30.1 JP34.2 JP34.3 L5.1 S5.P$1 U9.4 U10.EP Y9.2 Y9.4
GND5: A11.P$1 A11.P$2 A12.GND C126.2 C127.1 C128.2 C130.2 C131.2 C132.1 C133.1 C134.2 C135.2 C136.C C137.1 C138.1 C139.1 C141.2 C142.2 C143.2 C144.1 C145.2 C148.1 C149.1 C150.2 D29.C IC11.1 IC12.3 IC12.EXP IC12.M J6.GND J6.GNDBREAK JP36.GND1 JP36.P$1 JP36.P$2 JP36.P$3 JP36.P$4 JP37.1 JP41.2 JP41.3 L6.1 S6.P$1 U11.4 U12.EP Y11.2 Y11.4
IO0: JP2.4 JP6.6 Q2.3 R22.1 U1.23
IO1: C46.2 JP12.5 U4.8
IO2: JP2.3 U1.22
IO3: JP11.2 U4.42
IO4: JP2.5 U1.24
IO5: JP3.3 U1.34
IO6: JP11.1 U4.39
IO7: JP11.5 U4.38
IO8: JP14.1 U4.10
IO9: JP14.2 U4.11
IO10: JP10.6 U4.14
IO11: JP10.7 U4.15
IO12: JP4.3 U1.18
IO13: JP4.2 U1.20
IO14: JP4.4 U1.17
IO15: JP4.1 U1.21
IO16: JP3.8 U1.25
IO17: JP3.7 U1.27
IO18: JP3.6 U1.35
IO19: JP3.5 U1.38
IO20: JP10.8 U4.16
IO21: JP3.2 U1.42
IO22: JP3.1 U1.39
IO23: JP3.4 U1.36
IO24: JP10.3 U4.22
IO25: JP2.6 U1.14
IO26: JP2.7 U1.15
IO27: JP2.8 U1.16
IO28: JP12.4 U4.17
IO29: JP12.3 U4.18
IO30: JP12.2 U4.20
IO31: JP12.1 U4.21
IO32: JP9.6 JP10.4 Q4.3 R6.1 U4.23
IO33: JP10.5 U4.24
IO34: JP7.1 U1.10
IO35: JP7.2 U1.11
IO36: C20.1 JP4.6 U1.5
IO37: JP11.8 U4.25
IO38: JP11.7 U4.27
IO39: C21.2 JP4.5 U1.8
IO40: JP11.3 U4.34
IO41: JP11.6 U4.35
IO42: JP11.4 U4.36
IO43: C45.1 JP12.6 U4.5
IO44: C71.2 JP19.5 U6.8
IO45: JP18.2 U6.42
IO46: JP18.1 U6.39
IO47: JP18.5 U6.38
IO48: JP21.1 U6.10
IO49: JP21.2 U6.11
IO50: JP17.6 U6.14
IO51: JP17.7 U6.15
IO52: JP17.8 U6.16
IO53: JP17.3 U6.22
IO54: JP19.4 U6.17
IO55: JP19.3 U6.18
IO56: JP19.2 U6.20
IO57: JP19.1 U6.21
IO58: JP16.6 JP17.4 Q6.3 R16.1 U6.23
IO59: JP17.5 U6.24
IO60: JP18.8 U6.25
IO61: JP18.7 U6.27
IO62: JP18.3 U6.34
IO63: JP18.6 U6.35
IO64: JP18.4 U6.36
IO65: C70.1 JP19.6 U6.5
IO66: C96.2 JP26.5 U8.8
IO67: JP25.2 U8.42
IO68: JP25.1 U8.39
IO69: JP25.5 U8.38
IO70: JP28.1 U8.10
IO71: JP28.2 U8.11
IO72: JP24.6 U8.14
IO73: JP24.7 U8.15
IO74: JP24.8 U8.16
IO75: JP24.3 U8.22
IO76: JP26.4 U8.17
IO77: JP26.3 U8.18
IO78: JP26.2 U8.20
IO79: JP26.1 U8.21
IO80: JP23.6 JP24.4 Q8.3 R26.1 U8.23
IO81: JP24.5 U8.24
IO82: JP25.8 U8.25
IO83: JP25.7 U8.27
IO84: JP25.3 U8.34
IO85: JP25.6 U8.35
IO86: JP25.4 U8.36
IO87: C95.1 JP26.6 U8.5
IO88: C121.2 JP33.5 U10.8
IO89: JP32.2 U10.42
IO90: JP32.1 U10.39
IO91: JP32.5 U10.38
IO92: JP35.1 U10.10
IO93: JP35.2 U10.11
IO94: JP31.6 U10.14
IO95: JP31.7 U10.15
IO96: JP31.8 U10.16
IO97: JP31.3 U10.22
IO98: JP33.4 U10.17
IO99: JP33.3 U10.18
IO100: JP33.2 U10.20
IO101: JP33.1 U10.21
IO102: JP30.6 JP31.4 Q10.3 R34.1 U10.23
IO103: JP31.5 U10.24
IO104: JP32.8 U10.25
IO105: JP32.7 U10.27
IO106: JP32.3 U10.34
IO107: JP32.6 U10.35
IO108: JP32.4 U10.36
IO109: C120.1 JP33.6 U10.5
IO110: C147.2 JP40.5 U12.8
IO111: JP39.2 U12.42
IO112: JP39.1 U12.39
IO113: JP39.5 U12.38
IO114: JP42.1 U12.10
IO115: JP42.2 U12.11
IO116: JP38.6 U12.14
IO117: JP38.7 U12.15
IO118: JP38.8 U12.16
IO119: JP38.3 U12.22
IO120: JP40.4 U12.17
IO121: JP40.3 U12.18
IO122: JP40.2 U12.20
IO123: JP40.1 U12.21
IO124: JP37.6 JP38.4 Q12.3 R42.1 U12.23
IO125: JP38.5 U12.24
IO126: JP39.8 U12.25
IO127: JP39.7 U12.27
IO128: JP39.3 U12.34
IO129: JP39.6 U12.35
IO130: JP39.4 U12.36
IO131: C146.1 JP40.6 U12.5
LNA: C5.2 L2.2 U1.2
LNA1: C28.2 L1.2 U4.2
LNA2: C53.2 L3.2 U6.2
LNA3: C78.2 L4.2 U8.2
LNA4: C103.2 L5.2 U10.2
LNA5: C129.2 L6.2 U12.2
N$1: D1.C R8.1
N$2: C4.1 U1.45 Y1.3
N$3: C3.2 U1.44 Y1.1
N$5: IC2.4 JP1.D+1
N$7: A1.ANT R2.1
N$8: C27.1 U4.45 Y3.3
N$9: IC2.5 JP1.D-1
N$10: C26.2 U4.44 Y3.1
N$11: C15.2 R1.2 U1.47
N$12: D2.C R4.1
N$13: D6.A R7.2
N$14: C28.1 C44.1 R5.1
N$15: D3.C R10.1
N$16: D4.A J2.PWR
N$17: C15.1 C16.1 R1.1 U1.48
N$18: A2.P$3 R3.2
N$19: IC4.4 JP8.D+1
N$20: C5.1 C6.1 R3.1
N$21: D9.A R11.2
N$22: A4.ANT R12.1
N$23: D7.A J1.PWR
N$24: C21.1 U1.7
N$25: A3.P$3 R5.2
N$26: C20.2 U1.6
N$27: IC4.5 JP8.D-1
N$30: C22.2 U1.12 Y2.P$2
N$31: C23.2 U1.13 Y2.P$1
N$32: C39.2 R13.2 U4.47
N$33: C39.1 C40.1 R13.1 U4.48
N$34: C46.1 U4.7
N$35: C45.2 U4.6
N$36: C47.2 U4.12 Y4.P$2
N$37: C48.2 U4.13 Y4.P$1
N$38: D10.C R14.1
N$39: C52.1 U6.45 Y5.3
N$40: C51.2 U6.44 Y5.1
N$41: C53.1 C69.1 R15.1
N$42: D11.C R18.1
N$43: IC6.4 JP15.D+1
N$44: D14.A R19.2
N$45: A6.ANT R20.1
N$46: D12.A J3.PWR
N$47: A5.P$3 R15.2
N$48: IC6.5 JP15.D-1
N$51: C64.2 R21.2 U6.47
N$52: C64.1 C65.1 R21.1 U6.48
N$53: C71.1 U6.7
N$54: C70.2 U6.6
N$55: C72.2 U6.12 Y6.P$2
N$56: C73.2 U6.13 Y6.P$1
N$57: D15.C R24.1
N$58: C77.1 U8.45 Y7.3
N$59: C76.2 U8.44 Y7.1
N$60: C78.1 C94.1 R25.1
N$61: D16.C R28.1
N$62: IC8.4 JP22.D+1
N$63: D19.A R29.2
N$64: A8.ANT R30.1
N$65: D17.A J4.PWR
N$66: A7.P$3 R25.2
N$67: IC8.5 JP22.D-1
N$70: C89.2 R31.2 U8.47
N$71: C89.1 C90.1 R31.1 U8.48
N$72: C96.1 U8.7
N$73: C95.2 U8.6
N$74: C97.2 U8.12 Y8.P$2
N$75: C98.2 U8.13 Y8.P$1
N$76: D20.C R32.1
N$77: C102.1 U10.45 Y9.3
N$78: C101.2 U10.44 Y9.1
N$79: C103.1 C119.1 R33.1
N$80: D21.C R36.1
N$81: IC10.4 JP29.D+1
N$82: D24.A R37.2
N$83: A10.ANT R38.1
N$84: D22.A J5.PWR
N$85: A9.P$3 R33.2
N$86: IC10.5 JP29.D-1
N$89: C114.2 R39.2 U10.47
N$90: C114.1 C115.1 R39.1 U10.48
N$91: C121.1 U10.7
N$92: C120.2 U10.6
N$93: C123.2 U10.12 Y10.P$2
N$94: C124.2 U10.13 Y10.P$1
N$95: D25.C R40.1
N$96: C128.1 U12.45 Y11.3
N$97: C127.2 U12.44 Y11.1
N$98: C129.1 C145.1 R41.1
N$99: D26.C R44.1
N$100: IC12.4 JP36.D+1
N$101: D29.A R45.2
N$102: A12.ANT R46.1
N$103: D27.A J6.PWR
N$104: A11.P$3 R41.2
N$105: IC12.5 JP36.D-1
N$108: C140.2 R47.2 U12.47
N$109: C140.1 C141.1 R47.1 U12.48
N$110: C147.1 U12.7
N$111: C146.2 U12.6
N$112: C148.2 U12.12 Y12.P$2
N$113: C149.2 U12.13 Y12.P$1
N$114: D30.C R48.1
RI: IC2.2
RI1: IC4.2
RI2: IC6.2
RI3: IC8.2
RI4: IC10.2
RI5: IC12.2
RST: C7.1 JP5.6 JP6.3 Q1.3 R23.1 S1.P$2 U1.9
RST1: C30.1 JP9.3 JP13.6 Q3.3 R9.1 S2.P$2 U4.9
RST2: C55.1 JP16.3 JP20.6 Q5.3 R17.1 S3.P$2 U6.9
RST3: C80.1 JP23.3 JP27.6 Q7.3 R27.1 S4.P$2 U8.9
RST4: C105.1 JP30.3 JP34.6 Q9.3 R35.1 S5.P$2 U10.9
RST5: C131.1 JP37.3 JP41.6 Q11.3 R43.1 S6.P$2 U12.9
RTS: IC2.24 Q1.2 Q2.1
RTS1: IC4.24 Q3.2 Q4.1
RTS2: IC6.24 Q5.2 Q6.1
RTS3: IC8.24 Q7.2 Q8.1
RTS4: IC10.24 Q9.2 Q10.1
RTS5: IC12.24 Q11.2 Q12.1
SD_CLK: U1.31 U2.6
SD_CLK1: U3.6 U4.31
SD_CLK2: U5.6 U6.31
SD_CLK3: U7.6 U8.31
SD_CLK4: U9.6 U10.31
SD_CLK5: U11.6 U12.31
SD_CMD: U1.30 U2.1
SD_CMD1: U3.1 U4.30
SD_CMD2: U5.1 U6.30
SD_CMD3: U7.1 U8.30
SD_CMD4: U9.1 U10.30
SD_CMD5: U11.1 U12.30
SD_D0: U1.32 U2.2
SD_D1: U1.33 U2.5
SD_D2: U1.28 U2.7
SD_D3: U1.29 U2.3
SD_D4: U3.3 U4.29
SD_D5: U3.7 U4.28
SD_D6: U3.5 U4.33
SD_D7: U3.2 U4.32
SD_D8: U5.3 U6.29
SD_D9: U5.7 U6.28
SD_D10: U5.5 U6.33
SD_D11: U5.2 U6.32
SD_D12: U7.3 U8.29
SD_D13: U7.7 U8.28
SD_D14: U7.5 U8.33
SD_D15: U7.2 U8.32
SD_D16: U9.3 U10.29
SD_D17: U9.7 U10.28
SD_D18: U9.5 U10.33
SD_D19: U9.2 U10.32
SD_D20: U11.3 U12.29
SD_D21: U11.7 U12.28
SD_D22: U11.5 U12.33
SD_D23: U11.2 U12.32
U0RX: IC2.26 JP2.1 JP6.2 R4.2 U1.40
U0RX1: IC4.26 JP9.2 JP10.1 R14.2 U4.40
U0RX2: IC6.26 JP16.2 JP17.1 R24.2 U6.40
U0RX3: IC8.26 JP23.2 JP24.1 R32.2 U8.40
U0RX4: IC10.26 JP30.2 JP31.1 R40.2 U10.40
U0RX5: IC12.26 JP37.2 JP38.1 R48.2 U12.40
U0TX: IC2.25 JP2.2 JP6.4 R8.2 U1.41
U0TX1: IC4.25 JP9.4 JP10.2 R10.2 U4.41
U0TX2: IC6.25 JP16.4 JP17.2 R18.2 U6.41
U0TX3: IC8.25 JP23.4 JP24.2 R28.2 U8.41
U0TX4: IC10.25 JP30.4 JP31.2 R36.2 U10.41
U0TX5: IC12.25 JP37.4 JP38.2 R44.2 U12.41
USBVCC: C8.2 C13.2 D5.2 IC2.8 JP1.VBUS1
USBVCC1: C31.2 C37.2 D8.2 IC4.8 JP8.VBUS1
USBVCC2: C56.2 C62.2 D13.2 IC6.8 JP15.VBUS1
USBVCC3: C81.2 C87.2 D18.2 IC8.8 JP22.VBUS1
USBVCC4: C106.2 C112.2 D23.2 IC10.8 JP29.VBUS1
USBVCC5: C132.2 C138.2 D28.2 IC12.8 JP36.VBUS1
VIN: C10.1 D4.C D5.1 IC1.3 JP5.1
VIN1: C33.1 D7.C D8.1 IC3.3 JP13.1
VIN2: C58.1 D12.C D13.1 IC5.3 JP20.1
VIN3: C83.1 D17.C D18.1 IC7.3 JP27.1
VIN4: C108.1 D22.C D23.1 IC9.3 JP34.1
VIN5: C134.1 D27.C D28.1 IC11.3 JP41.1

## Tracks (layer width: path | path; a pad name or v marks a point on that pad's centre or on a via)
3V1  (via drill 0.3, 0.4, 0.5, 0.81)
  Top 0.152: U4.3 36.2,56.62 35.8,57.02
  Top 0.203: U4.43 39.19,53.29 39.24,53.34 v40.01,53.34 | U4.46 38.48,54.49 38.73,54.74 38.86,54.74 39.24,55.12 v39.37,55.12 39.91,55.66 C25.1 | U4.37 37.89,50.89 | U4.1 37.57,56.66 C42.1 38.43,58.89 38.51,58.97 C41.1 | U4.19 29.39,52.89 v29.08,52.58 | 34.9,61.87 34.9,61.49 35.05,61.34 35.05,59.44 35.6,58.89 C43.2 35.56,58.17 35.8,57.93 35.8,57.02 U4.4 | 31.73,62.36 31.5,62.13 31.5,59.71 R9.2 | U4.26 33,49.13 32.81,48.94 C34.1
  Top 0.254: 21.82,16 IC4.7 | IC4.6 21.31,16.18 21.49,16 21.82,16 | C32.2 22.94,15.24 | 22.94,15.24 22.23,15.24 | C36.2 21.84,16 21.82,16 | 34.9,61.87 34.42,62.36 31.73,62.36 | 22.94,15.24 26.67,15.24 27.18,15.75 | v37.47,15.88 37.59,15.75 R11.1 37.24,9.05 D3.A 35.56,6.73 35.18,6.35 32.26,6.35 31.75,6.86 D10.A | 37.89,50.89 37.89,50.33 v37.85,50.29 | 45.09,50.04 45.04,50.08 C38.2 41.02,50.46 v41.02,50.8
  Top 0.305: IC3.4 41.2,17.22 40.64,17.78 40.64,17.15 40.01,17.15 | 31.73,62.36 31.55,62.54 | 31.12,26.67 29.72,25.27 29.72,20.45 28.83,19.56 28.83,17.4 27.18,15.75 | 29.84,27.94 25.57,27.94 R6.2
  Top 0.406: JP9.5 31.55,66.5 31.55,62.54 | C32.2 C36.2 | C41.1 39.05,58.99 v39.5,59.44 | 31.43,44.32 C29.1 32,44.37 | 32,44.37 32.76,44.37 U3.8 | 30.48,44.32 31.96,44.32 32,44.37 | 31.5,48.9 32.22,48.9 C34.1
  Top 0.508: 31.12,26.67 29.84,27.94 29.84,43.69 30.48,44.32 31.5,45.34 31.5,48.9 v31.5,49.78
  Top 0.61: 46.36,29.85 45.09,31.12 45.09,50.04 45.09,57.66 43.31,59.44 v39.5,59.44 | 41.28,26.04 40.64,26.04 40.01,26.67 31.12,26.67
  Top 0.813: JP13.5 52.07,39.37 49.15,36.45 C35.A 49.15,29.33 C49.1 48.64,29.85 46.36,29.85 45.09,28.58 45.09,27.3 44.45,26.67 41.91,26.67 41.28,26.04 IC3.2 IC3.4
  Bottom 0.203: v29.08,52.58 29.21,52.58 29.46,52.83 30.28,52.83
  Bottom 0.254: 30.28,52.83 30.73,52.83 | v37.85,50.29 40.51,50.29 v41.02,50.8
  Bottom 0.406: v39.5,59.44 39.88,59.44 40.13,59.18 40.13,55.37 39.88,55.12 | 39.88,55.12 v39.37,55.12 | v40.01,53.34 40.01,54.99 39.88,55.12
  Bottom 0.61: JP9.5 30.73,52.83 30.73,50.55 v31.5,49.78
  Bottom 0.813: JP13.5 JP13.4
  other vias: 37.47,17.78 37.47,19.69 45.09,13.97 45.09,15.88 45.09,17.78 45.09,19.69 41.28,19.69 37.47,13.97
  pour Bottom (no thermals): 45.72,11.94 35.81,11.94 arc-90 35.31,12.45 35.31,21.34 35.31,21.84 35.31,22.1 arc-90 35.81,22.61 40.13,22.61 46.23,22.61 46.48,22.61 arc-90 46.99,22.1 46.99,12.45 arc-90 46.48,11.94
  pour Top (no thermals): 45.72,11.68 36.83,11.68 arc-90 36.45,12.06 36.45,20.96 36.45,21.11 arc-90 36.83,21.49 39.6,21.49 43.03,21.49 43.99,21.49 45.59,21.49 46.46,21.49 arc-90 46.99,20.96 46.99,12.19 arc-90 46.48,11.68
3V2  (via drill 0.3, 0.4, 0.5, 0.81)
  Top 0.152: U6.3 89.54,56.62 89.14,57.02
  Top 0.203: U6.43 92.53,53.29 92.58,53.34 v93.34,53.34 | U6.46 91.82,54.49 92.08,54.74 92.2,54.74 92.58,55.12 v92.71,55.12 93.25,55.66 C50.1 | U6.37 91.23,50.89 | U6.1 90.91,56.66 C67.1 91.77,58.89 91.85,58.97 C66.1 | U6.19 82.73,52.89 v82.42,52.58 | 88.24,61.87 88.24,61.49 88.39,61.34 88.39,59.44 88.94,58.89 C68.2 88.9,58.17 89.14,57.93 89.14,57.02 U6.4 | 85.06,62.36 84.84,62.13 84.84,59.71 R17.2 | U6.26 86.34,49.13 86.15,48.94 C59.1
  Top 0.254: 75.16,16 IC6.7 | IC6.6 74.65,16.18 74.83,16 75.16,16 | C57.2 76.28,15.24 | 76.28,15.24 75.56,15.24 | C61.2 75.18,16 75.16,16 | 88.24,61.87 87.76,62.36 85.06,62.36 | 76.28,15.24 80.01,15.24 80.52,15.75 | v90.81,15.88 90.93,15.75 R19.1 90.58,9.05 D11.A 88.9,6.73 88.52,6.35 85.6,6.35 85.09,6.86 D15.A | 91.23,50.89 91.23,50.33 v91.19,50.29 | 98.43,50.04 98.38,50.08 C63.2 94.36,50.46 v94.36,50.8
  Top 0.305: IC5.4 94.54,17.22 93.98,17.78 93.98,17.15 93.34,17.15 | 85.06,62.36 84.89,62.54 | 84.46,26.67 83.06,25.27 83.06,20.45 82.17,19.56 82.17,17.4 80.52,15.75 | 83.19,27.94 78.91,27.94 R16.2
  Top 0.406: JP16.5 84.89,66.5 84.89,62.54 | C57.2 C61.2 | C66.1 92.39,58.99 v92.84,59.44 | 84.77,44.32 C54.1 85.34,44.37 | 85.34,44.37 86.1,44.37 U5.8 | 83.82,44.32 85.3,44.32 85.34,44.37 | 84.84,48.9 85.56,48.9 C59.1
  Top 0.508: 84.46,26.67 83.19,27.94 83.19,43.69 83.82,44.32 84.84,45.34 84.84,48.9 v84.84,49.78
  Top 0.61: 99.7,29.85 98.43,31.12 98.43,50.04 98.43,57.66 96.65,59.44 v92.84,59.44 | 94.62,26.04 93.98,26.04 93.34,26.67 84.46,26.67
  Top 0.813: JP20.5 105.41,39.37 102.49,36.45 C60.A 102.49,29.33 C74.1 101.98,29.85 99.7,29.85 98.43,28.58 98.43,27.3 97.79,26.67 95.25,26.67 94.62,26.04 IC5.2 IC5.4
  Bottom 0.203: v82.42,52.58 82.55,52.58 82.8,52.83 83.62,52.83
  Bottom 0.254: 83.62,52.83 84.07,52.83 | v91.19,50.29 93.85,50.29 v94.36,50.8
  Bottom 0.406: v92.84,59.44 93.22,59.44 93.47,59.18 93.47,55.37 93.22,55.12 | 93.22,55.12 v92.71,55.12 | v93.34,53.34 93.34,54.99 93.22,55.12
  Bottom 0.61: JP16.5 84.07,52.83 84.07,50.55 v84.84,49.78
  Bottom 0.813: JP20.5 JP20.4
  other vias: 90.81,17.78 90.81,19.69 98.43,13.97 98.43,15.88 98.43,17.78 98.43,19.69 94.62,19.69 90.81,13.97
  pour Bottom (no thermals): 99.06,11.94 89.15,11.94 arc-90 88.65,12.45 88.65,21.34 88.65,21.84 88.65,22.1 arc-90 89.15,22.61 93.47,22.61 99.57,22.61 99.82,22.61 arc-90 100.33,22.1 100.33,12.45 arc-90 99.82,11.94
  pour Top (no thermals): 99.06,11.68 90.17,11.68 arc-90 89.79,12.06 89.79,20.96 89.79,21.11 arc-90 90.17,21.49 92.94,21.49 96.37,21.49 97.33,21.49 98.93,21.49 99.8,21.49 arc-90 100.33,20.96 100.33,12.19 arc-90 99.82,11.68
3V3  (via drill 0.3, 0.4, 0.5, 0.81)
  Top 0.152: U1.3 36.2,129.01 35.8,129.41
  Top 0.203: U1.43 39.19,125.68 39.24,125.73 v40.01,125.73 | U1.46 38.48,126.88 38.73,127.13 38.86,127.13 39.24,127.51 v39.37,127.51 39.91,128.05 C2.1 | U1.37 37.89,123.28 | U1.1 37.57,129.05 C18.1 38.43,131.28 38.51,131.36 C17.1 | U1.19 29.39,125.28 v29.08,124.97 | 34.9,134.26 34.9,133.88 35.05,133.73 35.05,131.83 35.6,131.28 C19.2 35.56,130.56 35.8,130.32 35.8,129.41 U1.4 | 31.73,134.75 31.5,134.52 31.5,132.1 R23.2 | U1.26 33,121.52 32.81,121.33 C1.1
  Top 0.254: 21.82,88.39 IC2.7 | IC2.6 21.31,88.57 21.49,88.39 21.82,88.39 | C9.2 22.94,87.63 | 22.94,87.63 22.23,87.63 | C12.2 21.84,88.39 21.82,88.39 | 34.9,134.26 34.42,134.75 31.73,134.75 | 22.94,87.63 26.67,87.63 27.18,88.14 | v37.47,88.27 37.59,88.14 R7.1 37.24,81.44 D1.A 35.56,79.12 35.18,78.74 32.26,78.74 31.75,79.25 D2.A | 37.89,123.28 37.89,122.72 v37.85,122.68 | 45.09,122.43 45.04,122.47 C14.2 41.02,122.85 v41.02,123.19
  Top 0.305: IC1.4 41.2,89.61 40.64,90.17 40.64,89.53 40.01,89.53 | 31.73,134.75 31.55,134.93 | 31.12,99.06 29.72,97.66 29.72,92.84 28.83,91.95 28.83,89.79 27.18,88.14 | 29.84,100.33 25.57,100.33 R22.2
  Top 0.406: JP6.5 31.55,138.89 31.55,134.93 | C9.2 C12.2 | C17.1 39.05,131.38 v39.5,131.83 | 31.43,116.71 C122.1 32,116.75 | 32,116.75 32.76,116.75 U2.8 | 30.48,116.71 31.96,116.71 32,116.75 | 31.5,121.28 32.22,121.28 C1.1
  Top 0.508: 31.12,99.06 29.84,100.33 29.84,116.08 30.48,116.71 31.5,117.73 31.5,121.28 v31.5,122.17
  Top 0.61: 46.36,102.23 45.09,103.5 45.09,122.43 45.09,130.05 43.31,131.83 v39.5,131.83 | 41.28,98.43 40.64,98.43 40.01,99.06 31.12,99.06
  Top 0.813: JP5.5 52.07,111.76 49.15,108.84 C11.A 49.15,101.72 C24.1 48.64,102.23 46.36,102.23 45.09,100.97 45.09,99.7 44.45,99.06 41.91,99.06 41.28,98.43 IC1.2 IC1.4
  Bottom 0.203: v29.08,124.97 29.21,124.97 29.46,125.22 30.28,125.22
  Bottom 0.254: 30.28,125.22 30.73,125.22 | v37.85,122.68 40.51,122.68 v41.02,123.19
  Bottom 0.406: v39.5,131.83 39.88,131.83 40.13,131.57 40.13,127.76 39.88,127.51 | 39.88,127.51 v39.37,127.51 | v40.01,125.73 40.01,127.38 39.88,127.51
  Bottom 0.61: JP6.5 30.73,125.22 30.73,122.94 v31.5,122.17
  Bottom 0.813: JP5.5 JP5.4
  other vias: 37.47,90.17 37.47,92.08 45.09,86.36 45.09,88.27 45.09,90.17 45.09,92.08 41.28,92.08 37.47,86.36
  pour Bottom (no thermals): 45.72,84.33 35.81,84.33 arc-90 35.31,84.84 35.31,93.73 35.31,94.23 35.31,94.49 arc-90 35.81,95 40.13,95 46.23,95 46.48,95 arc-90 46.99,94.49 46.99,84.84 arc-90 46.48,84.33
  pour Top (no thermals): 45.72,84.07 36.83,84.07 arc-90 36.45,84.45 36.45,93.34 36.45,93.5 arc-90 36.83,93.88 39.6,93.88 43.03,93.88 43.99,93.88 45.59,93.88 46.46,93.88 arc-90 46.99,93.34 46.99,84.58 arc-90 46.48,84.07
3V4  (via drill 0.3, 0.4, 0.5, 0.81)
  Top 0.152: U8.3 89.54,129.01 89.14,129.41
  Top 0.203: U8.43 92.53,125.68 92.58,125.73 v93.34,125.73 | U8.46 91.82,126.88 92.08,127.13 92.2,127.13 92.58,127.51 v92.71,127.51 93.25,128.05 C75.1 | U8.37 91.23,123.28 | U8.1 90.91,129.05 C92.1 91.77,131.28 91.85,131.36 C91.1 | U8.19 82.73,125.28 v82.42,124.97 | 88.24,134.26 88.24,133.88 88.39,133.73 88.39,131.83 88.94,131.28 C93.2 88.9,130.56 89.14,130.32 89.14,129.41 U8.4 | 85.06,134.75 84.84,134.52 84.84,132.1 R27.2 | U8.26 86.34,121.52 86.15,121.33 C84.1
  Top 0.254: 75.16,88.39 IC8.7 | IC8.6 74.65,88.57 74.83,88.39 75.16,88.39 | C82.2 76.28,87.63 | 76.28,87.63 75.56,87.63 | C86.2 75.18,88.39 75.16,88.39 | 88.24,134.26 87.76,134.75 85.06,134.75 | 76.28,87.63 80.01,87.63 80.52,88.14 | v90.81,88.27 90.93,88.14 R29.1 90.58,81.44 D16.A 88.9,79.12 88.52,78.74 85.6,78.74 85.09,79.25 D20.A | 91.23,123.28 91.23,122.72 v91.19,122.68 | 98.43,122.43 98.38,122.47 C88.2 94.36,122.85 v94.36,123.19
  Top 0.305: IC7.4 94.54,89.61 93.98,90.17 93.98,89.53 93.34,89.53 | 85.06,134.75 84.89,134.93 | 84.46,99.06 83.06,97.66 83.06,92.84 82.17,91.95 82.17,89.79 80.52,88.14 | 83.19,100.33 78.91,100.33 R26.2
  Top 0.406: JP23.5 84.89,138.89 84.89,134.93 | C82.2 C86.2 | C91.1 92.39,131.38 v92.84,131.83 | 84.77,116.71 C79.1 85.34,116.75 | 85.34,116.75 86.1,116.75 U7.8 | 83.82,116.71 85.3,116.71 85.34,116.75 | 84.84,121.28 85.56,121.28 C84.1
  Top 0.508: 84.46,99.06 83.19,100.33 83.19,116.08 83.82,116.71 84.84,117.73 84.84,121.28 v84.84,122.17
  Top 0.61: 99.7,102.23 98.43,103.5 98.43,122.43 98.43,130.05 96.65,131.83 v92.84,131.83 | 94.62,98.43 93.98,98.43 93.34,99.06 84.46,99.06
  Top 0.813: JP27.5 105.41,111.76 102.49,108.84 C85.A 102.49,101.72 C99.1 101.98,102.23 99.7,102.23 98.43,100.97 98.43,99.7 97.79,99.06 95.25,99.06 94.62,98.43 IC7.2 IC7.4
  Bottom 0.203: v82.42,124.97 82.55,124.97 82.8,125.22 83.62,125.22
  Bottom 0.254: 83.62,125.22 84.07,125.22 | v91.19,122.68 93.85,122.68 v94.36,123.19
  Bottom 0.406: v92.84,131.83 93.22,131.83 93.47,131.57 93.47,127.76 93.22,127.51 | 93.22,127.51 v92.71,127.51 | v93.34,125.73 93.34,127.38 93.22,127.51
  Bottom 0.61: JP23.5 84.07,125.22 84.07,122.94 v84.84,122.17
  Bottom 0.813: JP27.5 JP27.4
  other vias: 90.81,90.17 90.81,92.08 98.43,86.36 98.43,88.27 98.43,90.17 98.43,92.08 94.62,92.08 90.81,86.36
  pour Bottom (no thermals): 99.06,84.33 89.15,84.33 arc-90 88.65,84.84 88.65,93.73 88.65,94.23 88.65,94.49 arc-90 89.15,95 93.47,95 99.57,95 99.82,95 arc-90 100.33,94.49 100.33,84.84 arc-90 99.82,84.33
  pour Top (no thermals): 99.06,84.07 90.17,84.07 arc-90 89.79,84.45 89.79,93.34 89.79,93.5 arc-90 90.17,93.88 92.94,93.88 96.37,93.88 97.33,93.88 98.93,93.88 99.8,93.88 arc-90 100.33,93.34 100.33,84.58 arc-90 99.82,84.07
3V5  (via drill 0.3, 0.4, 0.5, 0.81)
  Top 0.152: U10.3 142.88,129.01 142.48,129.41
  Top 0.203: U10.43 145.87,125.68 145.92,125.73 v146.69,125.73 | U10.46 145.16,126.88 145.42,127.13 145.54,127.13 145.92,127.51 v146.05,127.51 146.59,128.05 C100.1 | U10.37 144.57,123.28 | U10.1 144.25,129.05 C117.1 145.11,131.28 145.19,131.36 C116.1 | U10.19 136.07,125.28 v135.76,124.97 | 141.58,134.26 141.58,133.88 141.73,133.73 141.73,131.83 142.28,131.28 C118.2 142.24,130.56 142.48,130.32 142.48,129.41 U10.4 | 138.41,134.75 138.18,134.52 138.18,132.1 R35.2 | U10.26 139.68,121.52 139.49,121.33 C109.1
  Top 0.254: 128.5,88.39 IC10.7 | IC10.6 127.99,88.57 128.17,88.39 128.5,88.39 | C107.2 129.62,87.63 | 129.62,87.63 128.91,87.63 | C111.2 128.52,88.39 128.5,88.39 | 141.58,134.26 141.1,134.75 138.41,134.75 | 129.62,87.63 133.35,87.63 133.86,88.14 | v144.15,88.27 144.27,88.14 R37.1 143.92,81.44 D21.A 142.24,79.12 141.86,78.74 138.94,78.74 138.43,79.25 D25.A | 144.57,123.28 144.57,122.72 v144.53,122.68 | 151.77,122.43 151.72,122.47 C113.2 147.7,122.85 v147.7,123.19
  Top 0.305: IC9.4 147.88,89.61 147.32,90.17 147.32,89.53 146.69,89.53 | 138.41,134.75 138.23,134.93 | 137.8,99.06 136.4,97.66 136.4,92.84 135.51,91.95 135.51,89.79 133.86,88.14 | 136.53,100.33 132.25,100.33 R34.2
  Top 0.406: JP30.5 138.23,138.89 138.23,134.93 | C107.2 C111.2 | C116.1 145.73,131.38 v146.18,131.83 | 138.11,116.71 C104.1 138.68,116.75 | 138.68,116.75 139.44,116.75 U9.8 | 137.16,116.71 138.64,116.71 138.68,116.75 | 138.18,121.28 138.9,121.28 C109.1
  Top 0.508: 137.8,99.06 136.53,100.33 136.53,116.08 137.16,116.71 138.18,117.73 138.18,121.28 v138.18,122.17
  Top 0.61: 153.03,102.23 151.77,103.5 151.77,122.43 151.77,130.05 149.99,131.83 v146.18,131.83 | 147.96,98.43 147.32,98.43 146.69,99.06 137.8,99.06
  Top 0.813: JP34.5 158.75,111.76 155.83,108.84 C110.A 155.83,101.72 C125.1 155.32,102.23 153.03,102.23 151.77,100.97 151.77,99.7 151.13,99.06 148.59,99.06 147.96,98.43 IC9.2 IC9.4
  Bottom 0.203: v135.76,124.97 135.89,124.97 136.14,125.22 136.96,125.22
  Bottom 0.254: 136.96,125.22 137.41,125.22 | v144.53,122.68 147.19,122.68 v147.7,123.19
  Bottom 0.406: v146.18,131.83 146.56,131.83 146.81,131.57 146.81,127.76 146.56,127.51 | 146.56,127.51 v146.05,127.51 | v146.69,125.73 146.69,127.38 146.56,127.51
  Bottom 0.61: JP30.5 137.41,125.22 137.41,122.94 v138.18,122.17
  Bottom 0.813: JP34.5 JP34.4
  other vias: 144.15,90.17 144.15,92.08 151.77,86.36 151.77,88.27 151.77,90.17 151.77,92.08 147.96,92.08 144.15,86.36
  pour Bottom (no thermals): 152.4,84.33 142.49,84.33 arc-90 141.99,84.84 141.99,93.73 141.99,94.23 141.99,94.49 arc-90 142.49,95 146.81,95 152.91,95 153.16,95 arc-90 153.67,94.49 153.67,84.84 arc-90 153.16,84.33
  pour Top (no thermals): 152.4,84.07 143.51,84.07 arc-90 143.13,84.45 143.13,93.34 143.13,93.5 arc-90 143.51,93.88 146.28,93.88 149.71,93.88 150.67,93.88 152.27,93.88 153.14,93.88 arc-90 153.67,93.34 153.67,84.58 arc-90 153.16,84.07
3V6  (via drill 0.3, 0.4, 0.5, 0.81)
  Top 0.152: U12.3 142.88,56.62 142.48,57.02
  Top 0.203: U12.43 145.87,53.29 145.92,53.34 v146.69,53.34 | U12.46 145.16,54.49 145.42,54.74 145.54,54.74 145.92,55.12 v146.05,55.12 146.59,55.66 C126.1 | U12.37 144.57,50.89 | U12.1 144.25,56.66 C143.1 145.11,58.89 145.19,58.97 C142.1 | U12.19 136.07,52.89 v135.76,52.58 | 141.58,61.87 141.58,61.49 141.73,61.34 141.73,59.44 142.28,58.89 C144.2 142.24,58.17 142.48,57.93 142.48,57.02 U12.4 | 138.41,62.36 138.18,62.13 138.18,59.71 R43.2 | U12.26 139.68,49.13 139.49,48.94 C135.1
  Top 0.254: 128.5,16 IC12.7 | IC12.6 127.99,16.18 128.17,16 128.5,16 | C133.2 129.62,15.24 | 129.62,15.24 128.91,15.24 | C137.2 128.52,16 128.5,16 | 141.58,61.87 141.1,62.36 138.41,62.36 | 129.62,15.24 133.35,15.24 133.86,15.75 | v144.15,15.88 144.27,15.75 R45.1 143.92,9.05 D26.A 142.24,6.73 141.86,6.35 138.94,6.35 138.43,6.86 D30.A | 144.57,50.89 144.57,50.33 v144.53,50.29 | 151.77,50.04 151.72,50.08 C139.2 147.7,50.46 v147.7,50.8
  Top 0.305: IC11.4 147.88,17.22 147.32,17.78 147.32,17.15 146.69,17.15 | 138.41,62.36 138.23,62.54 | 137.8,26.67 136.4,25.27 136.4,20.45 135.51,19.56 135.51,17.4 133.86,15.75 | 136.53,27.94 132.25,27.94 R42.2
  Top 0.406: JP37.5 138.23,66.5 138.23,62.54 | C133.2 C137.2 | C142.1 145.73,58.99 v146.18,59.44 | 138.11,44.32 C130.1 138.68,44.37 | 138.68,44.37 139.44,44.37 U11.8 | 137.16,44.32 138.64,44.32 138.68,44.37 | 138.18,48.9 138.9,48.9 C135.1
  Top 0.508: 137.8,26.67 136.53,27.94 136.53,43.69 137.16,44.32 138.18,45.34 138.18,48.9 v138.18,49.78
  Top 0.61: 153.03,29.85 151.77,31.12 151.77,50.04 151.77,57.66 149.99,59.44 v146.18,59.44 | 147.96,26.04 147.32,26.04 146.69,26.67 137.8,26.67
  Top 0.813: JP41.5 158.75,39.37 155.83,36.45 C136.A 155.83,29.33 C150.1 155.32,29.85 153.03,29.85 151.77,28.58 151.77,27.3 151.13,26.67 148.59,26.67 147.96,26.04 IC11.2 IC11.4
  Bottom 0.203: v135.76,52.58 135.89,52.58 136.14,52.83 136.96,52.83
  Bottom 0.254: 136.96,52.83 137.41,52.83 | v144.53,50.29 147.19,50.29 v147.7,50.8
  Bottom 0.406: v146.18,59.44 146.56,59.44 146.81,59.18 146.81,55.37 146.56,55.12 | 146.56,55.12 v146.05,55.12 | v146.69,53.34 146.69,54.99 146.56,55.12
  Bottom 0.61: JP37.5 137.41,52.83 137.41,50.55 v138.18,49.78
  Bottom 0.813: JP41.5 JP41.4
  other vias: 144.15,17.78 144.15,19.69 151.77,13.97 151.77,15.88 151.77,17.78 151.77,19.69 147.96,19.69 144.15,13.97
  pour Bottom (no thermals): 152.4,11.94 142.49,11.94 arc-90 141.99,12.45 141.99,21.34 141.99,21.84 141.99,22.1 arc-90 142.49,22.61 146.81,22.61 152.91,22.61 153.16,22.61 arc-90 153.67,22.1 153.67,12.45 arc-90 153.16,11.94
  pour Top (no thermals): 152.4,11.68 143.51,11.68 arc-90 143.13,12.06 143.13,20.96 143.13,21.11 arc-90 143.51,21.49 146.28,21.49 149.71,21.49 150.67,21.49 152.27,21.49 153.14,21.49 arc-90 153.67,20.96 153.67,12.19 arc-90 153.16,11.68
CTS  (via drill 0.3)
  Top 0.254: IC2.23 17.8,92.46 16.97,92.46 16.64,92.79 15.85,92.79 15.62,93.02 v15.62,93.04
  Bottom 0.254: v15.62,93.04 15.57,92.99 14.73,92.99 13.61,91.87 11.63,91.87 v11.38,92
CTS1  (via drill 0.3)
  Top 0.254: IC4.23 17.8,20.07 16.97,20.07 16.64,20.4 15.85,20.4 15.62,20.62 v15.62,20.65
  Bottom 0.254: v15.62,20.65 15.57,20.6 14.73,20.6 13.61,19.48 11.63,19.48 v11.38,19.61
CTS2  (via drill 0.3)
  Top 0.254: IC6.23 71.14,20.07 70.31,20.07 69.98,20.4 69.19,20.4 68.96,20.62 v68.96,20.65
  Bottom 0.254: v68.96,20.65 68.91,20.6 68.07,20.6 66.95,19.48 64.97,19.48 v64.72,19.61
CTS3  (via drill 0.3)
  Top 0.254: IC8.23 71.14,92.46 70.31,92.46 69.98,92.79 69.19,92.79 68.96,93.02 v68.96,93.04
  Bottom 0.254: v68.96,93.04 68.91,92.99 68.07,92.99 66.95,91.87 64.97,91.87 v64.72,92
CTS4  (via drill 0.3)
  Top 0.254: IC10.23 124.48,92.46 123.65,92.46 123.32,92.79 122.53,92.79 122.3,93.02 v122.3,93.04
  Bottom 0.254: v122.3,93.04 122.25,92.99 121.41,92.99 120.29,91.87 118.31,91.87 v118.06,92
CTS5  (via drill 0.3)
  Top 0.254: IC12.23 124.48,20.07 123.65,20.07 123.32,20.4 122.53,20.4 122.3,20.62 v122.3,20.65
  Bottom 0.254: v122.3,20.65 122.25,20.6 121.41,20.6 120.29,19.48 118.31,19.48 v118.06,19.61
DTR  (via drill 0.3)